# Altium PCB Multimodal.PcbDoc (part 1 of 3)
Units mil, origin at the board's own origin, x right, y up, seen from the top; angles counter-clockwise.
Board outline 1182.8 x 2149.26 mil, 6 copper layers (L1_TOP, L2_GND, L3_Signal, L4_PWR, L5_GND, L6_BOTTOM), stack 44.646 mil thick; 156 components, 97 nets, 528 pads, 619 vias.
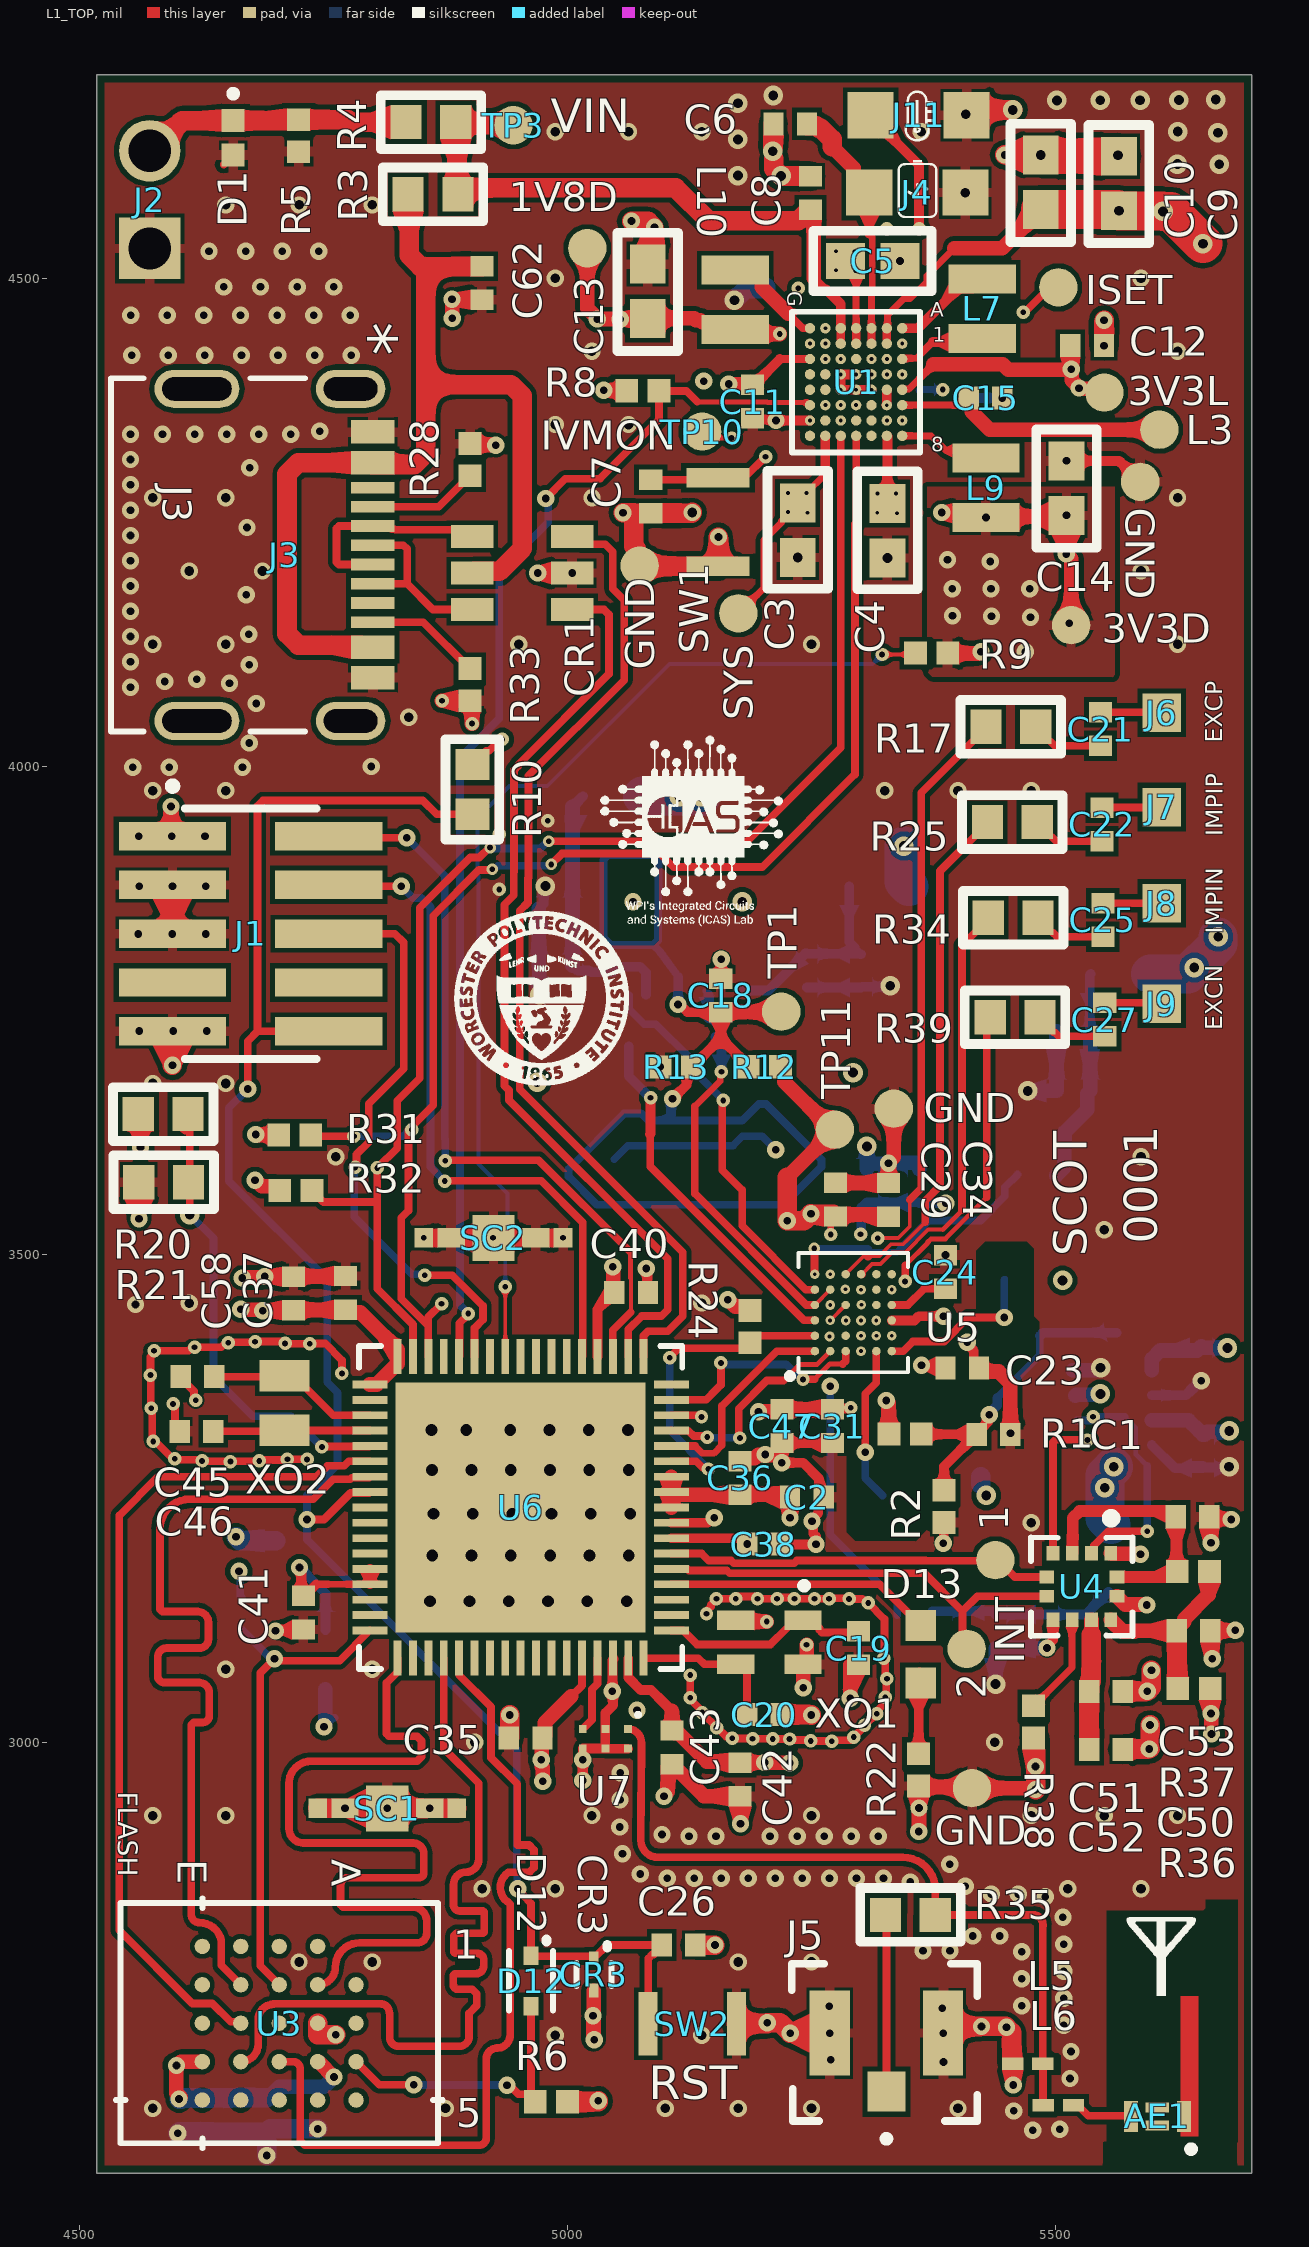
[diagram p0: L1_TOP view]
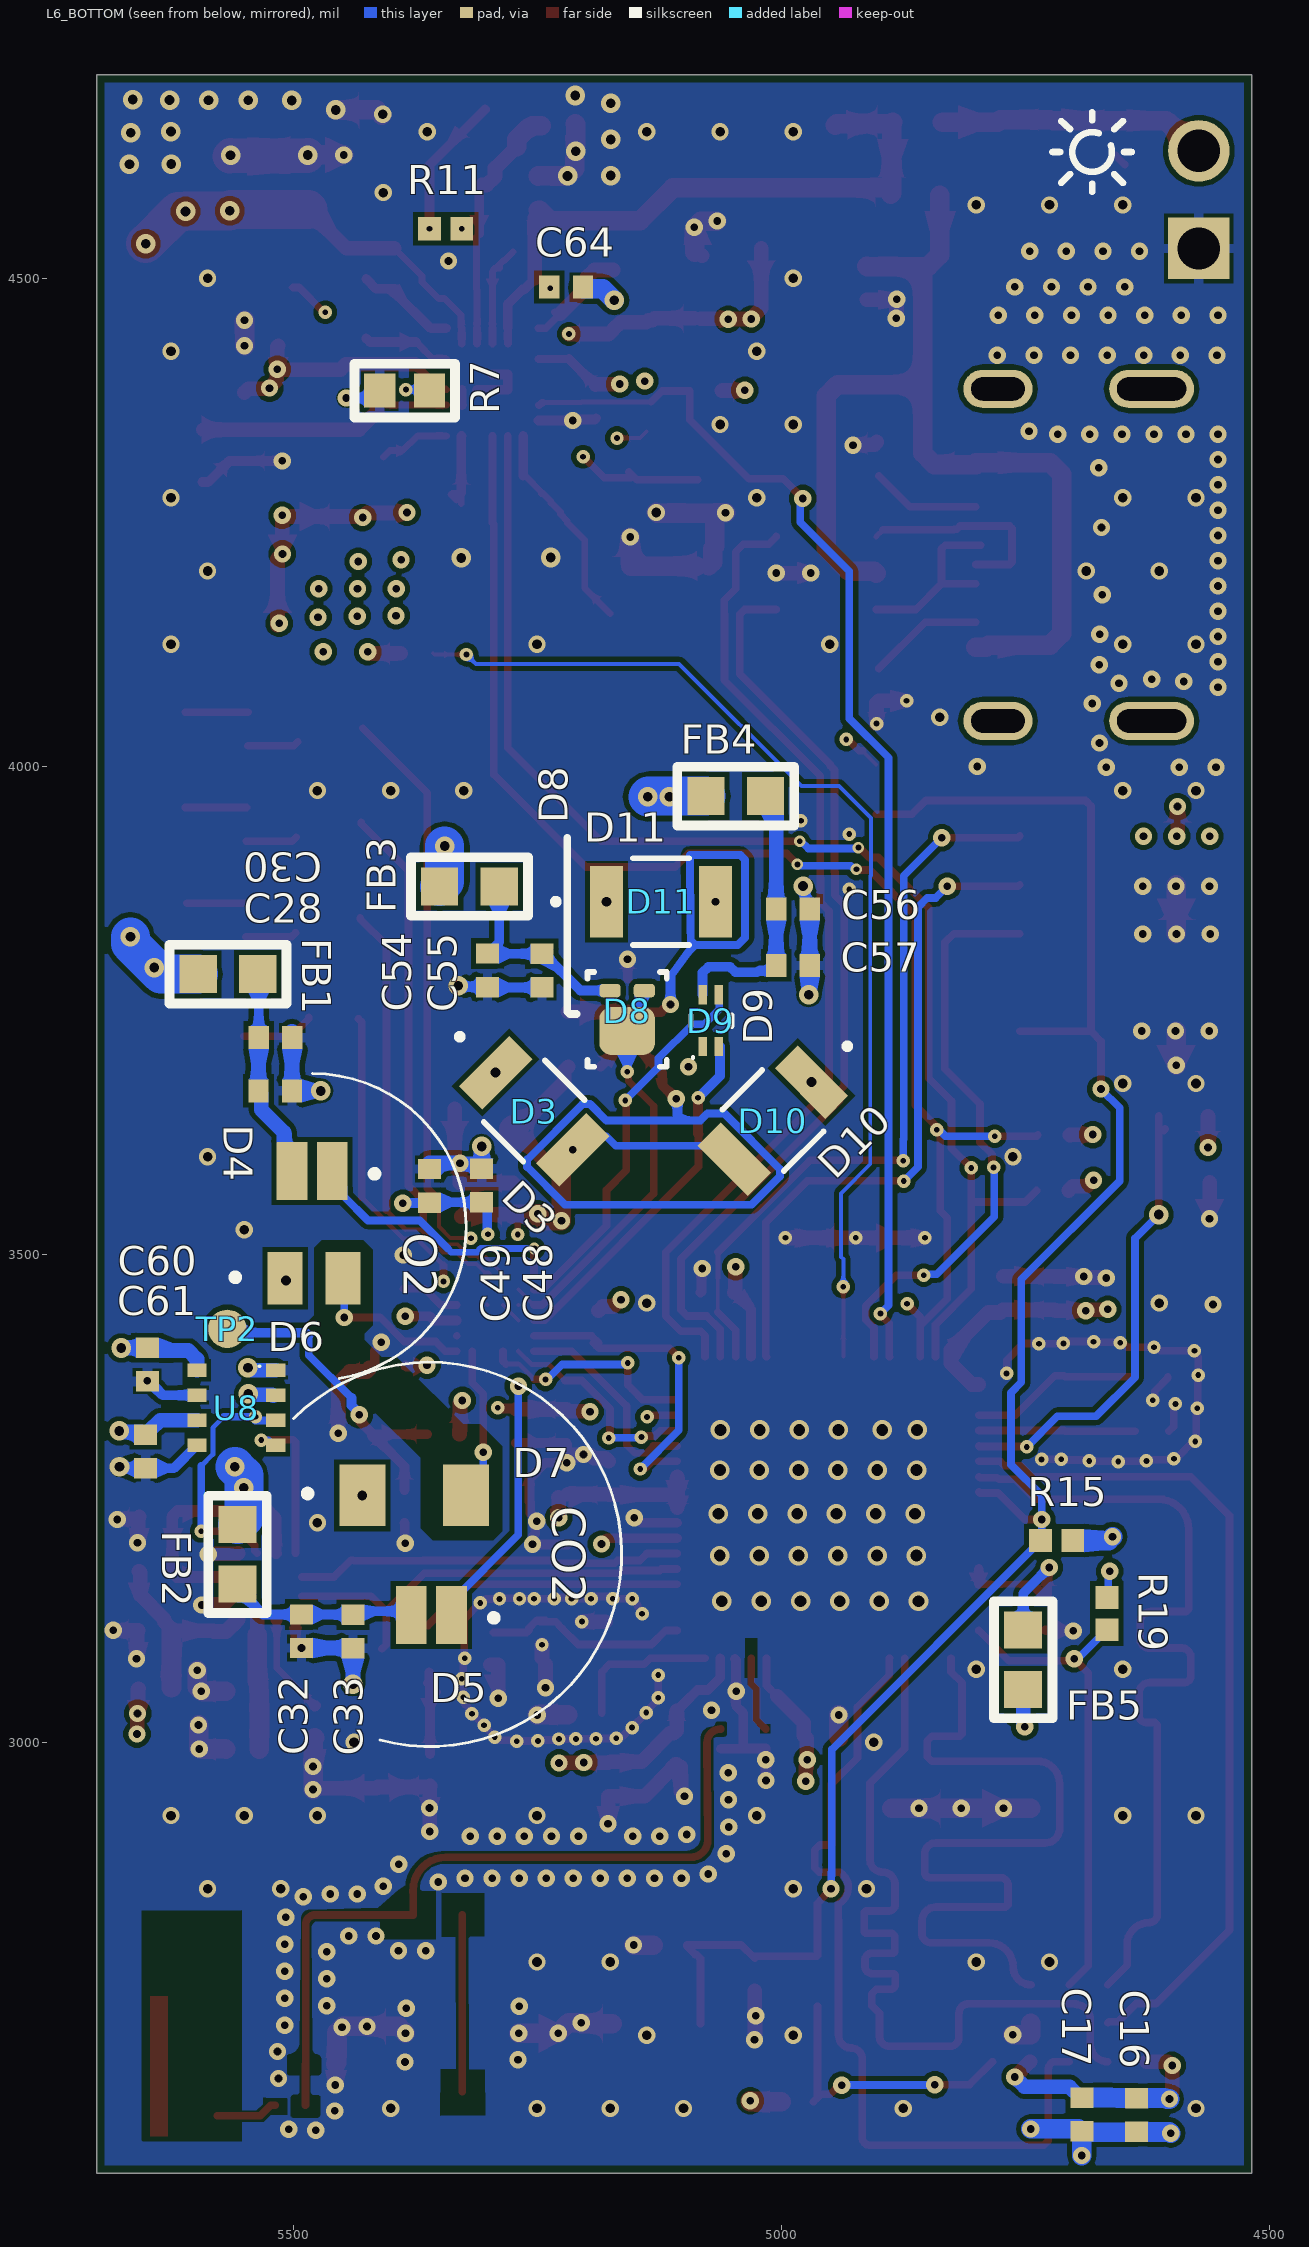
[diagram p1: L6_BOTTOM view, seen from below]
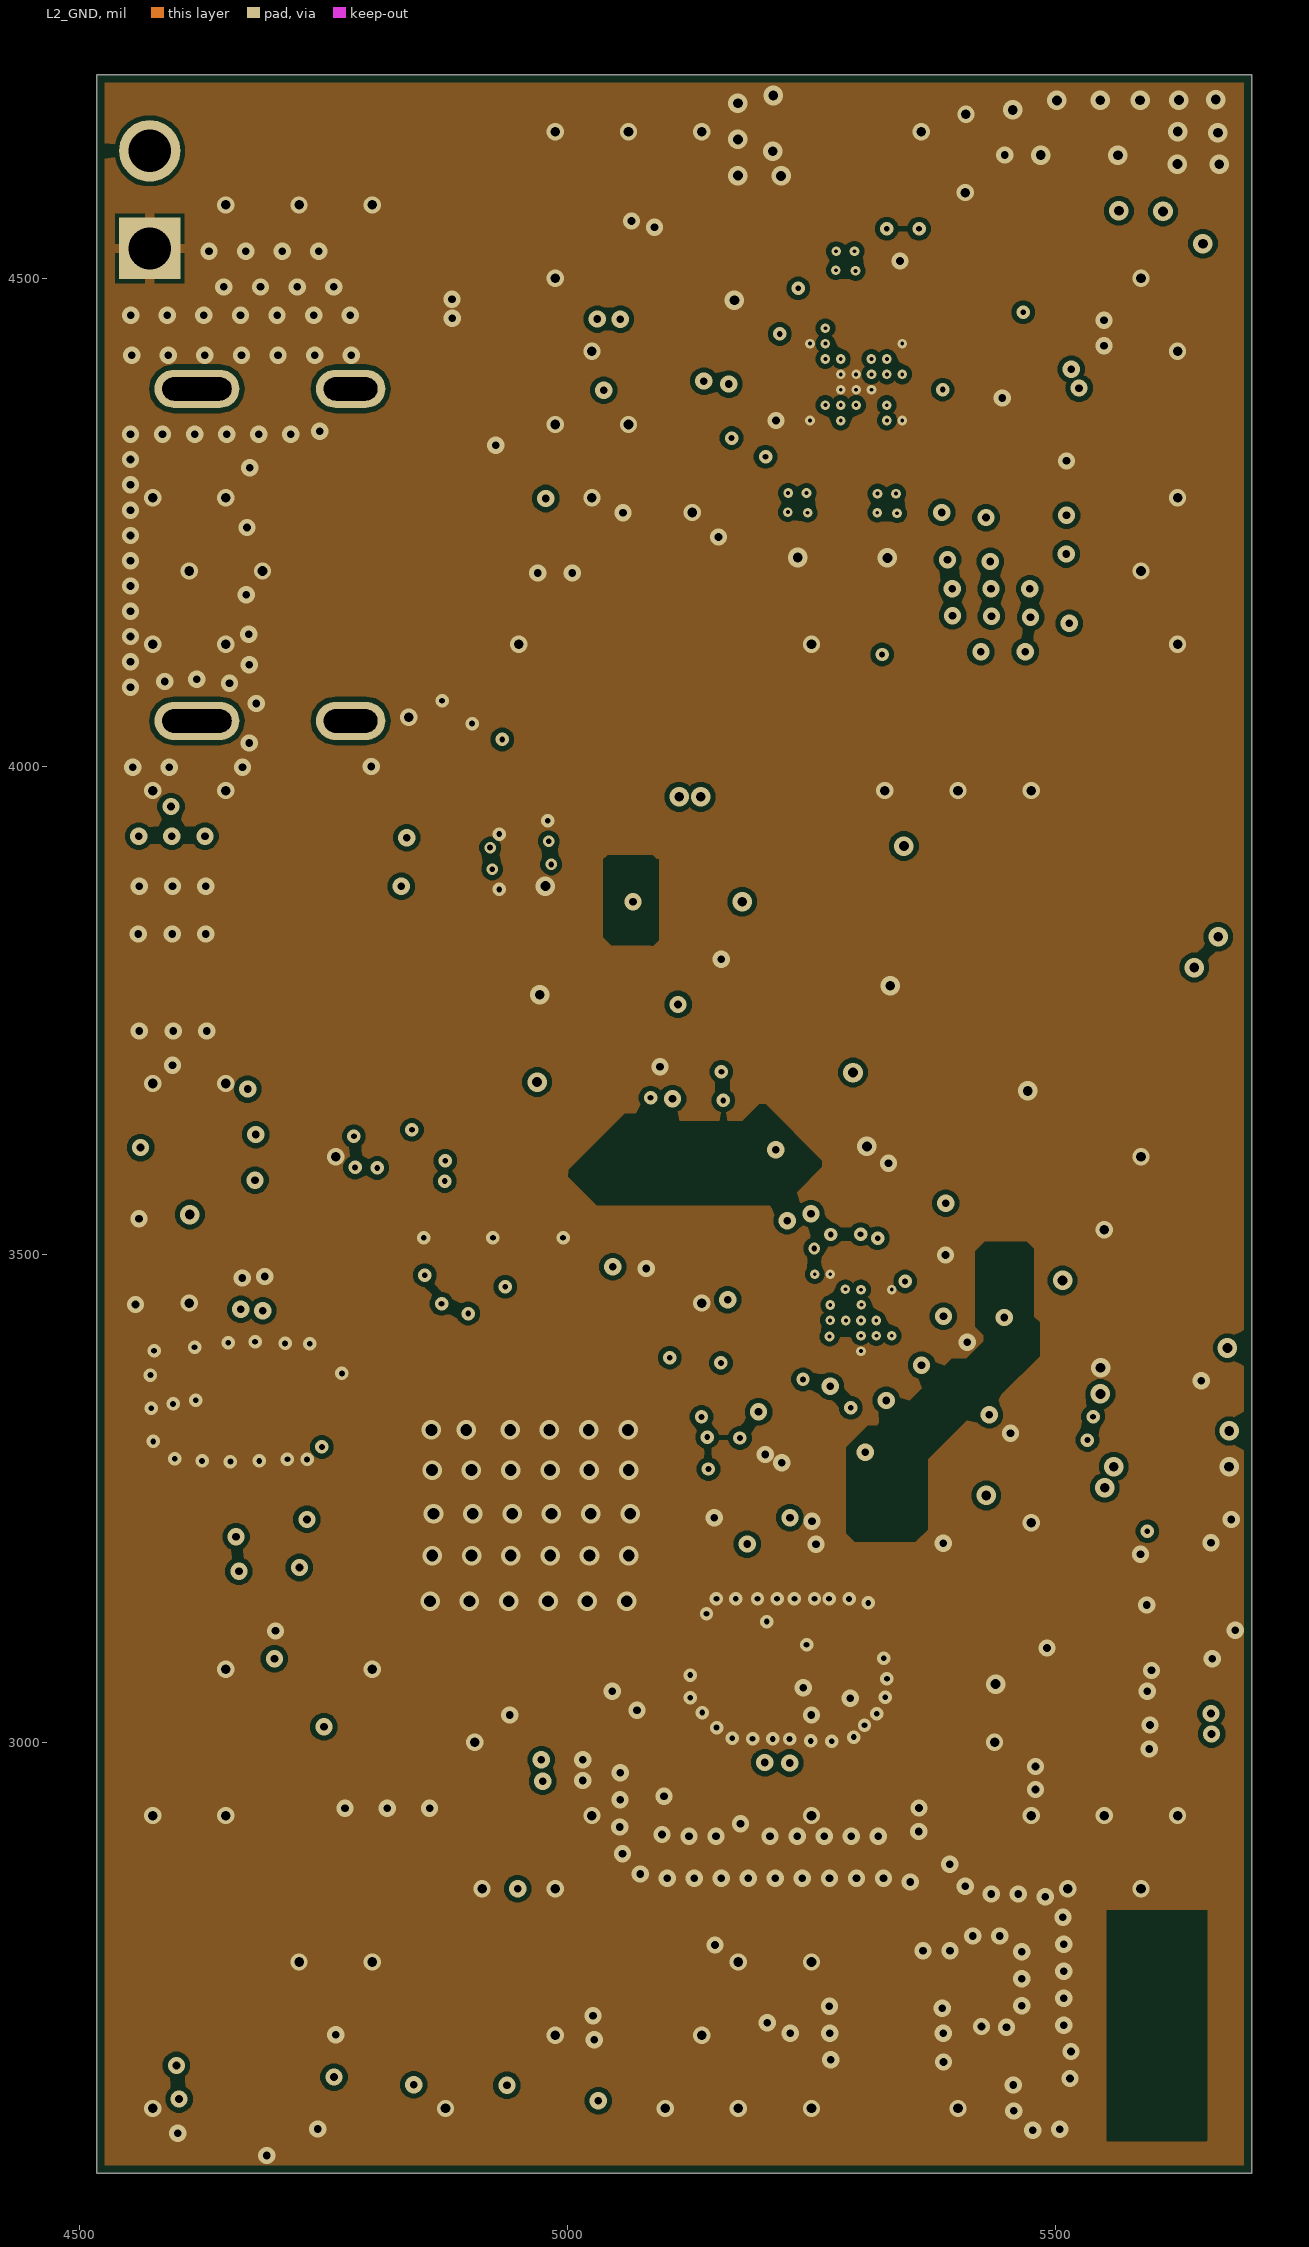
[diagram p2: L2_GND]
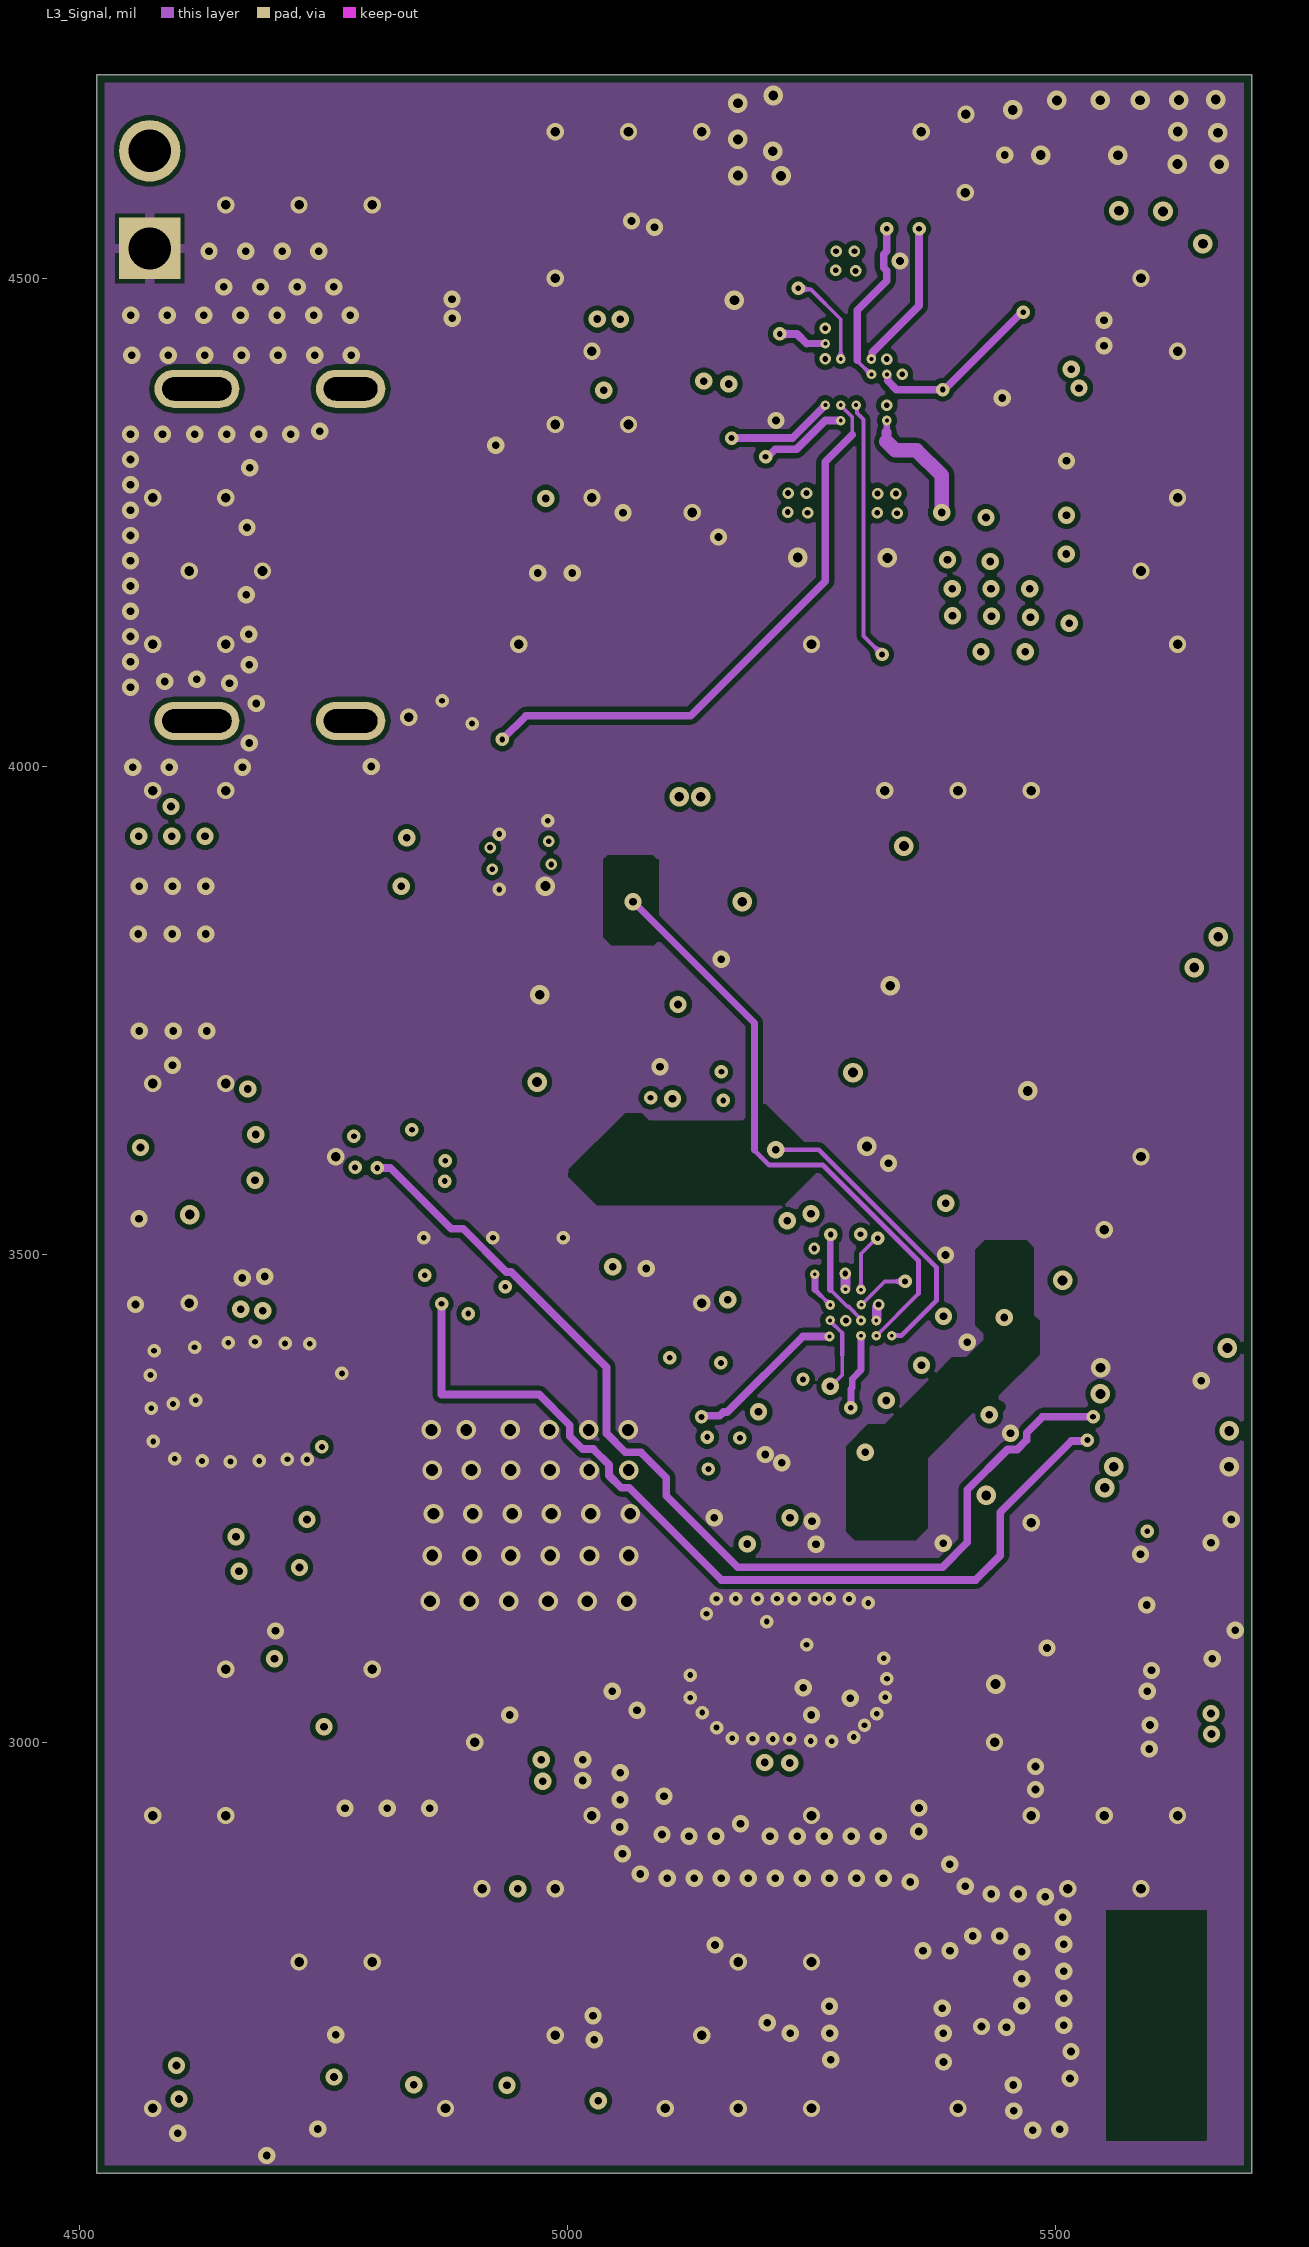
[diagram p3: L3_Signal]
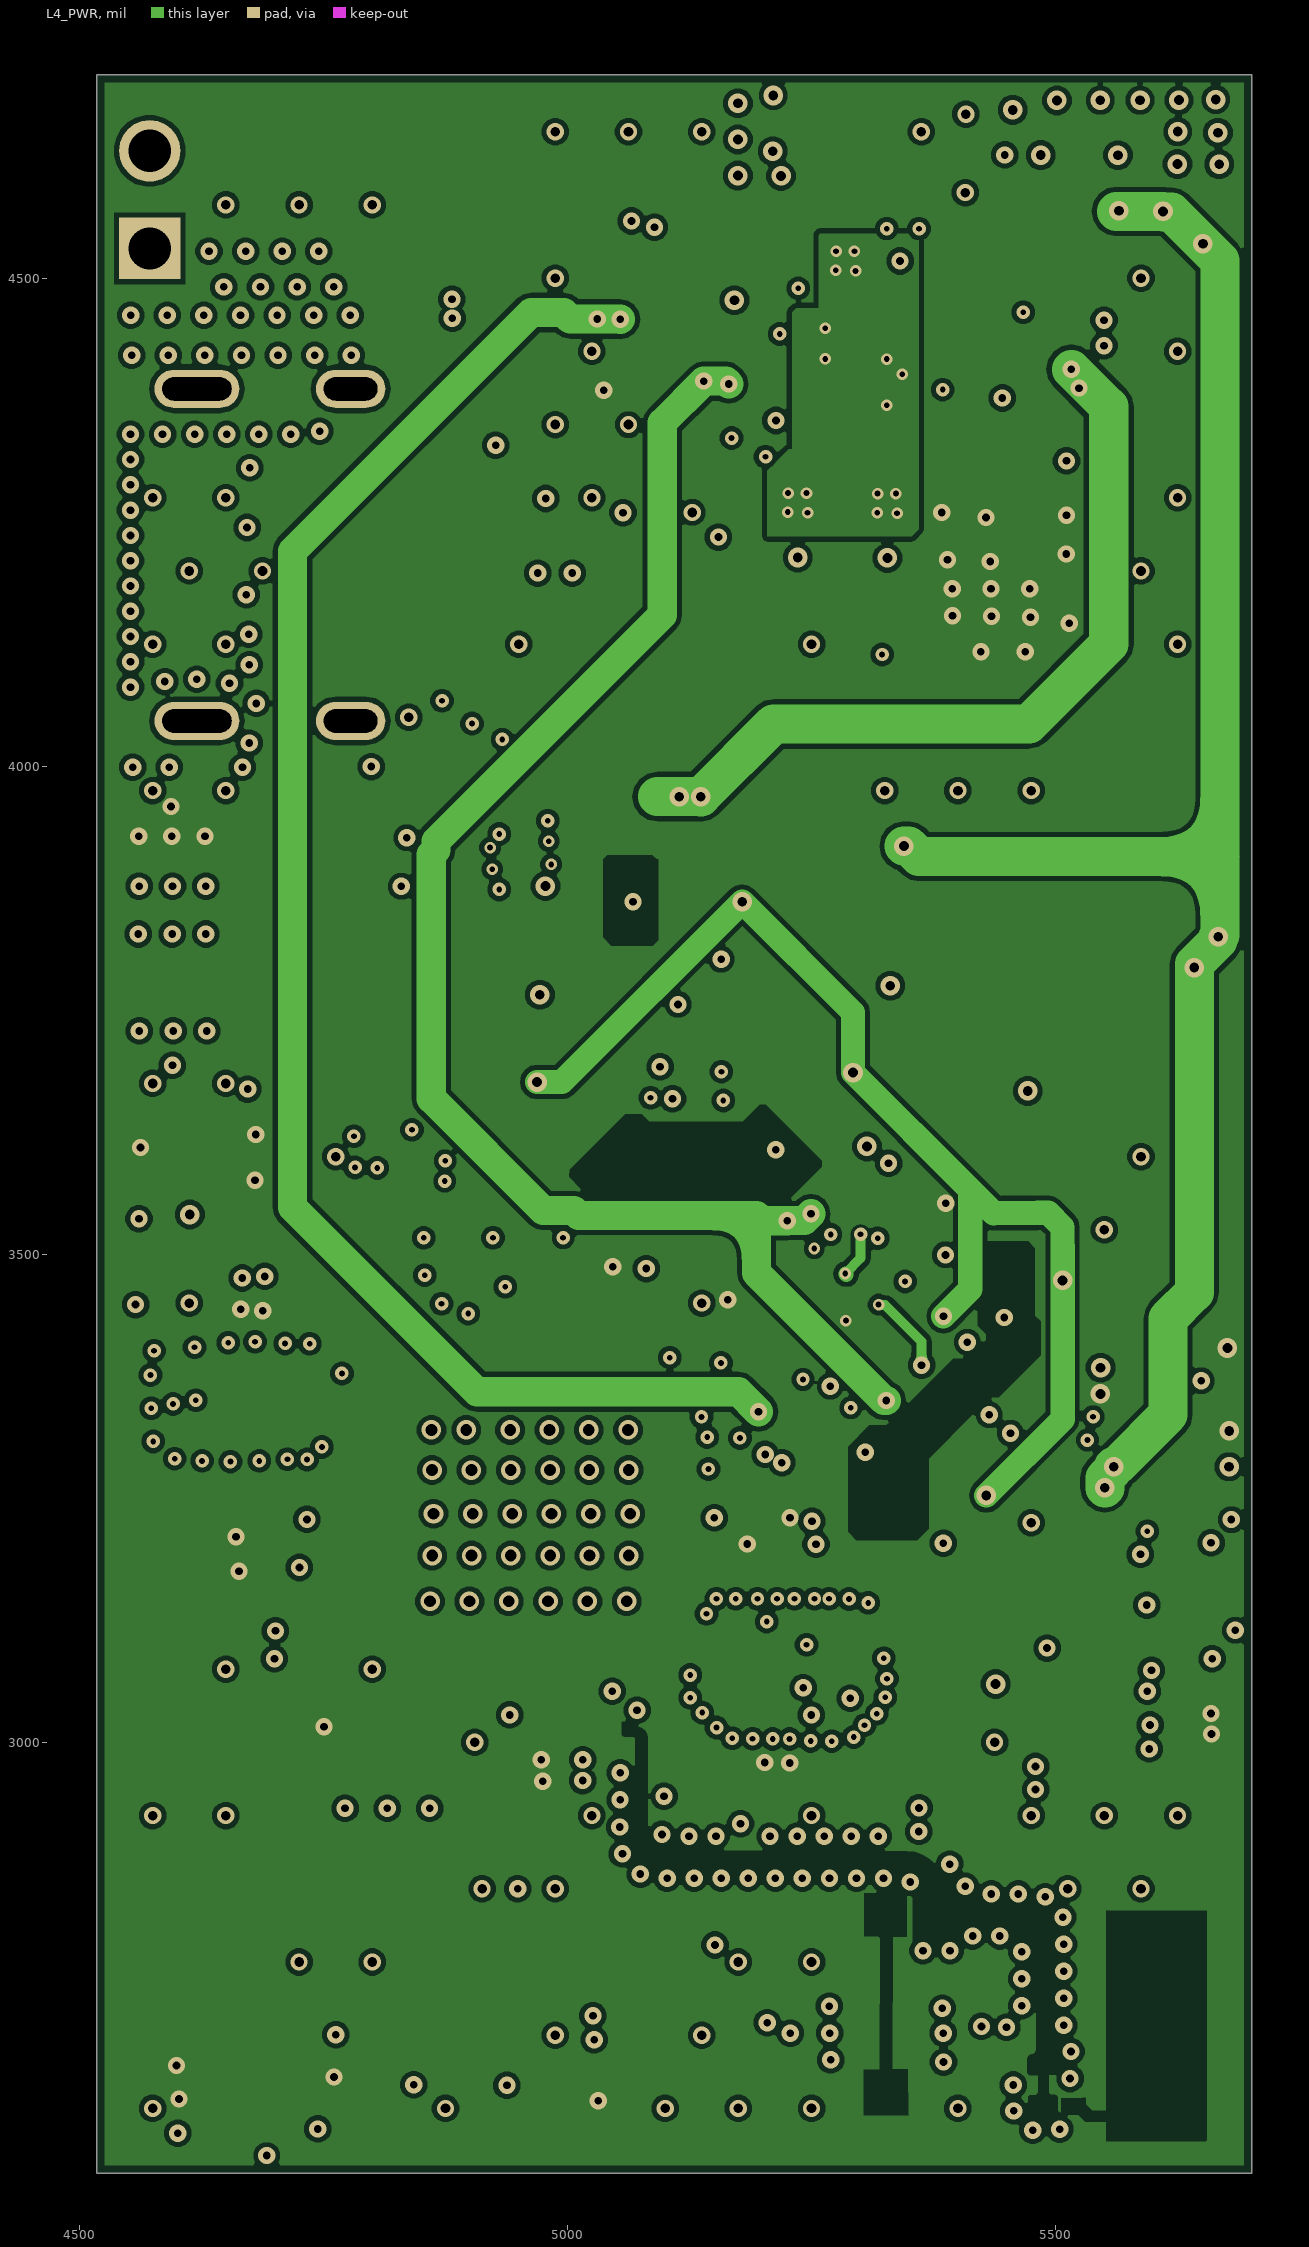
[diagram p4: L4_PWR]
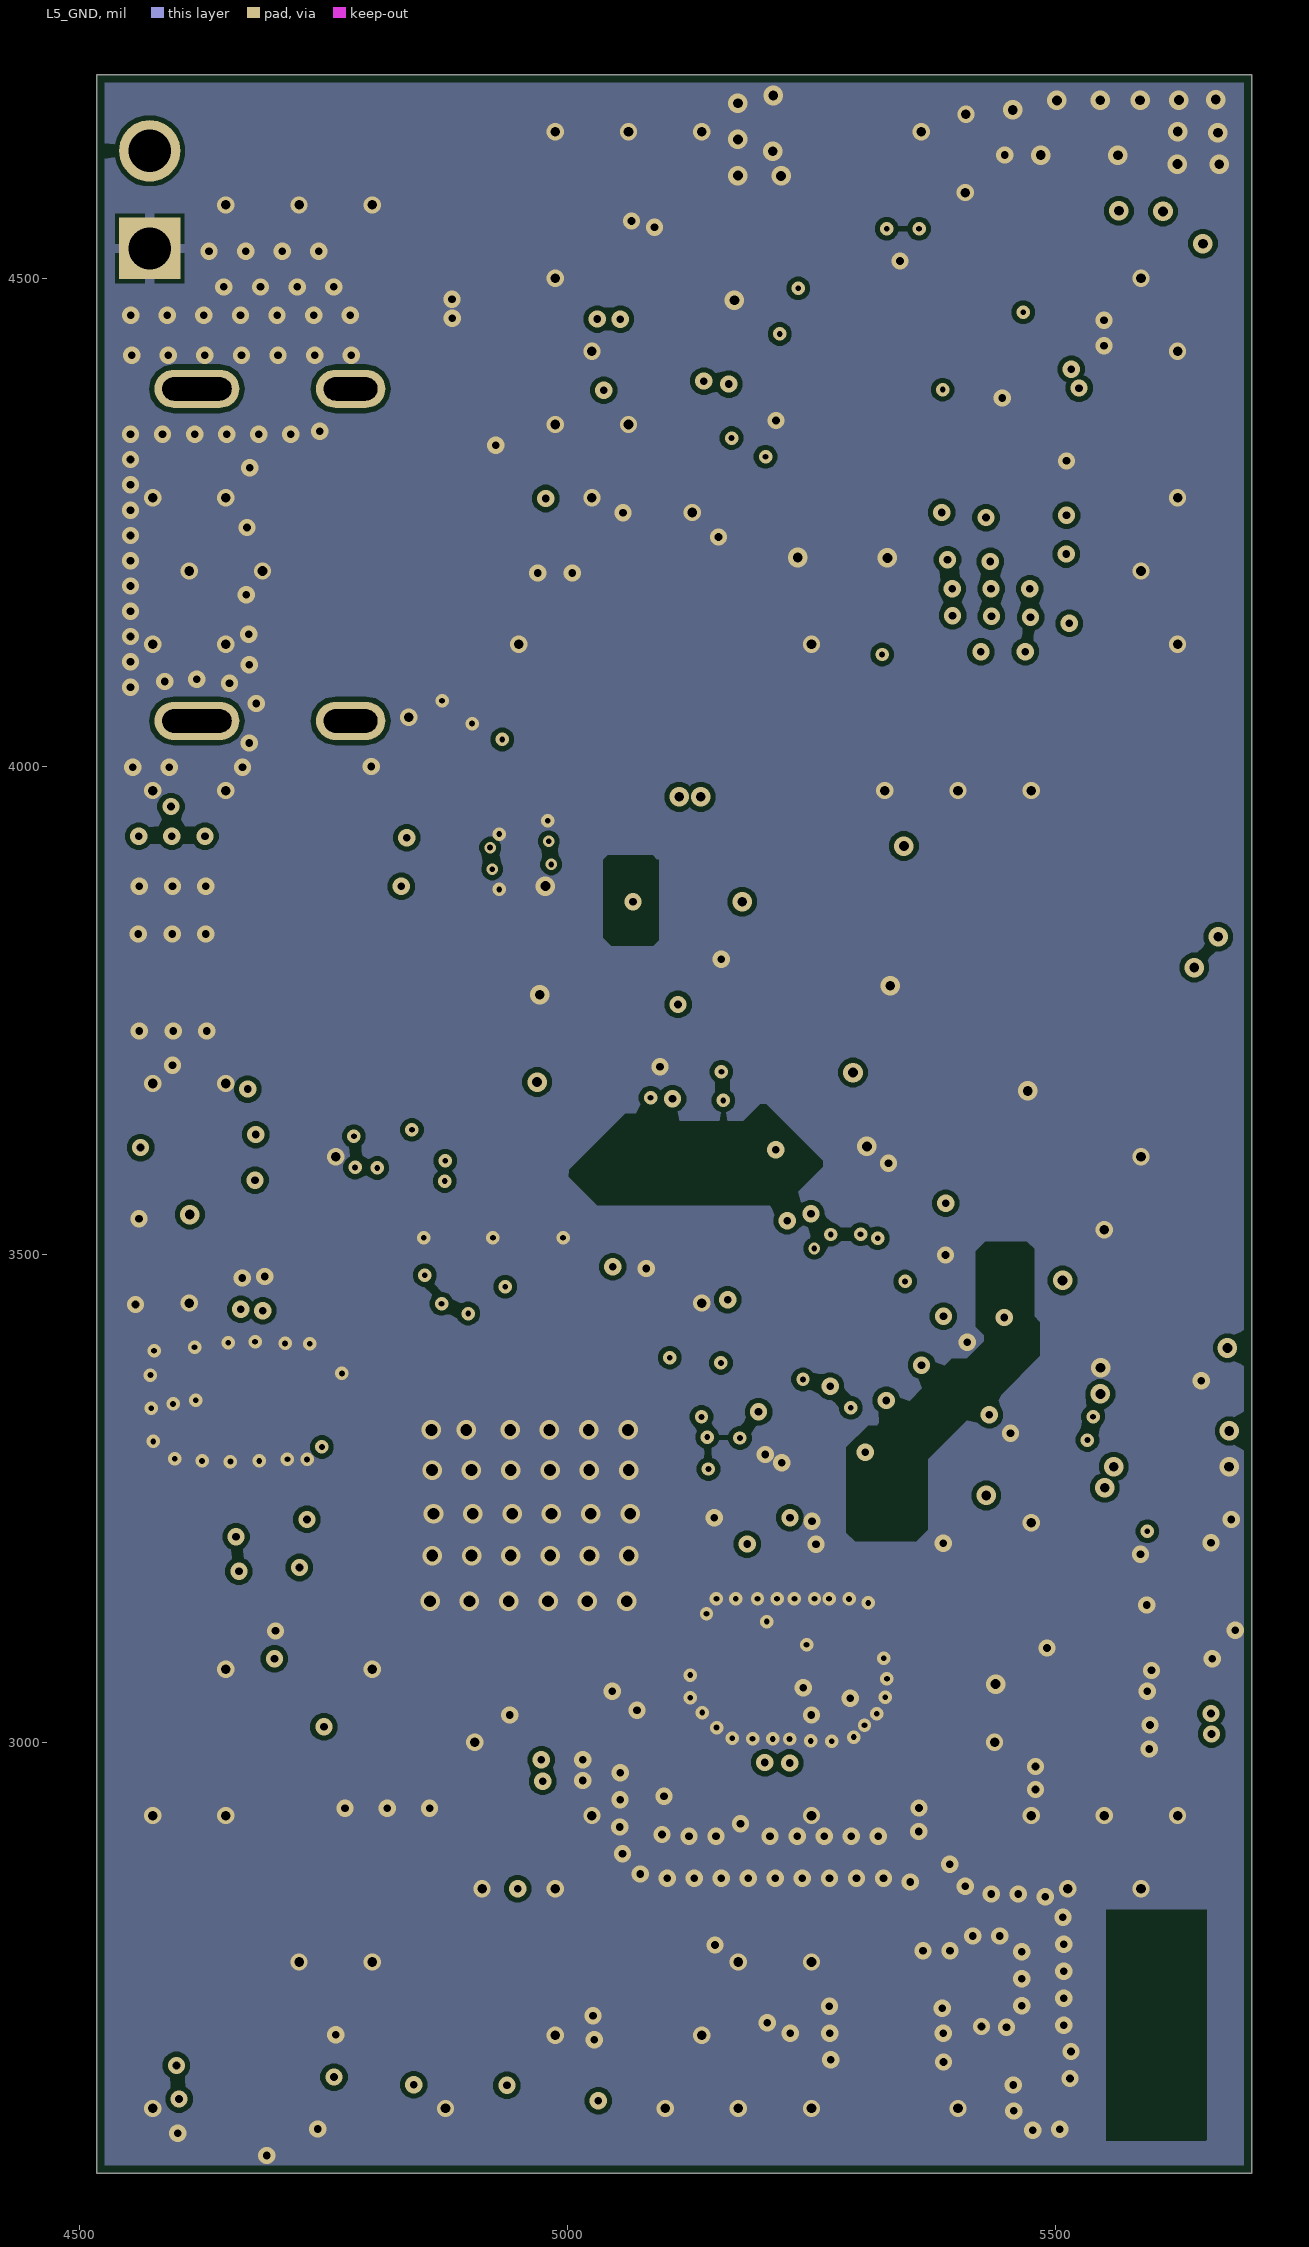
[diagram p5: L5_GND]
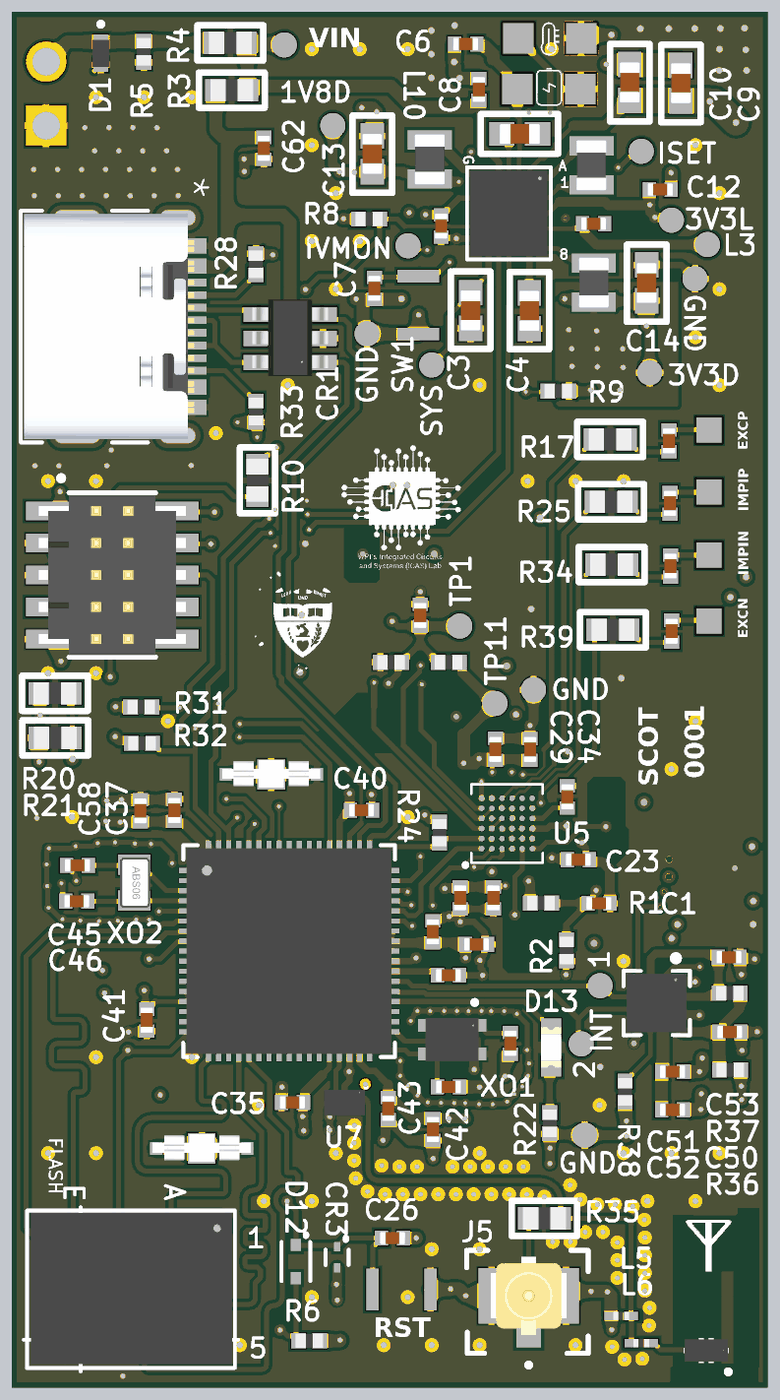
[diagram p8: 3D render of the assembled board from above, using the file's embedded part models]
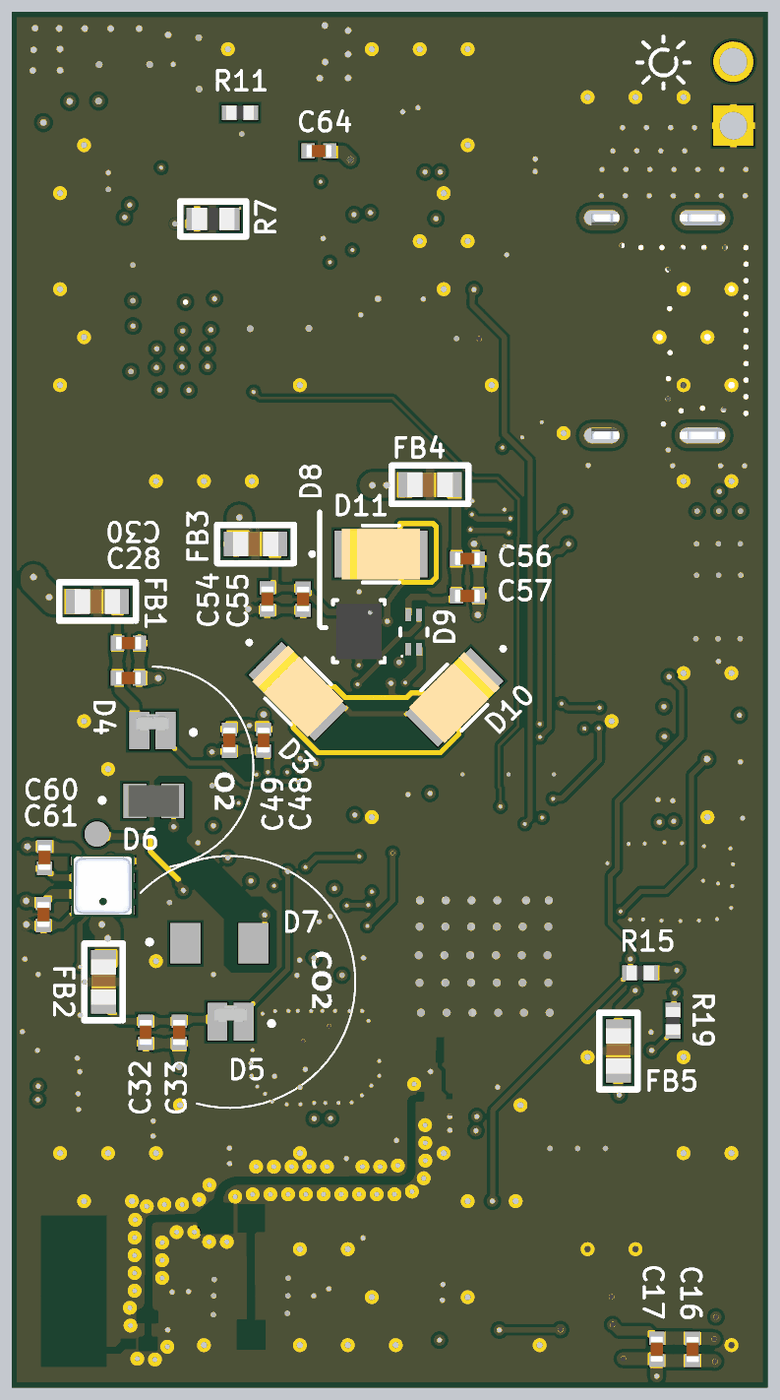
[diagram p9: 3D render of the assembled board from below, using the file's embedded part models]

## Layer stack, top to bottom
Top Solder: solder mask 0.4, Solder Resist, Dk 3.5
L1_TOP: signal copper 0.689
Dielectric 2: prepreg 4.7047, PP-006, Dk 4.45
L2_GND: signal copper 1.378
Dielectric 4: core 9.0551, PP-006, Dk 4.6
L3_Signal: signal copper 1.378
Dielectric 6: prepreg 5.1181, PP-006, Dk 4.45
Dielectric 7: prepreg 5.1181, PP-006, Dk 4.45
L4_PWR: signal copper 1.378
Dielectric 5: core 9.0551, PP-006, Dk 4.6
L5_GND: signal copper 1.378
Dielectric 3: prepreg 4.7047, PP-006, Dk 4.45
L6_BOTTOM: signal copper 0.689
Bottom Solder: solder mask 0.4, Solder Resist, Dk 3.5

## Board outline
4518,2558.83 5700.8,2558.83 5700.8,4708.09 4518,4708.09

## Design rules (kind name [scope] priority, off if disabled: settings)
BoardOutlineClearance [All] p1: gap=7.87 ignorepadtopadclearanceinfootprint=FALSE
Clearance Clearance_1 [All] p1: gap=5 ignorepadtopadclearanceinfootprint=TRUE except(2.36: Arc-Arc Arc-Track Track-Track; 3.94: Arc-SMDPad Arc-THPad Arc-Via Track-SMDPad Track-THPad Track-Via SMDPad-Via THPad-Via Via-Via)
Clearance Clearance_viapad_blind [IsBlindVia] p2: gap=3 ignorepadtopadclearanceinfootprint=TRUE
Clearance Clearance_viapad_microvia [IsMicroVia] p3: gap=3 ignorepadtopadclearanceinfootprint=TRUE
Clearance Clearance_keepout [Keepout] p4: gap=0 ignorepadtopadclearanceinfootprint=TRUE
ComponentClearance [All] p1: gap=4 collisioncheckmode=3 verticalgap=4 showdistances=TRUE
DiffPairsRouting [All] p1: maxlimit=15 minlimit=3 mostfreqgap=7.7 toplayer_minwidth=4 toplayer_maxwidth=71497.94 toplayer_prefwidth=4.46 midlayer1_minwidth=4 midlayer1_maxwidth=71497.94 midlayer1_prefwidth=4.46 midlayer2_minwidth=4 midlayer2_maxwidth=71497.94 midlayer2_prefwidth=4.46 midlayer3_minwidth=4 midlayer3_maxwidth=71497.94 midlayer3_prefwidth=4.46 midlayer4_minwidth=4 midlayer4_maxwidth=71497.94 midlayer4_prefwidth=4.46 bottomlayer_minwidth=4 bottomlayer_maxwidth=71497.94 bottomlayer_prefwidth=4.46 maxuncoupledlength=500
Height [All] p1: minheight=0 maxheight=71497.94 prefheight=500
HoleSize [All] p1: absolutevalues=TRUE maxlimit=248.03 minlimit=3.94 maxpercent=80.000 minpercent=20.000
HoleToHoleClearance [All] p1: gap=7.87 allowstackedmicrovias=TRUE
MatchedLengths flash_quad_spi [InNetClass('FLASH_QUAD_SPI')] p1: tolerance=10 checknetsindiffpair=FALSE checkdiffpairvsdiffpair=TRUE checkxsignals=TRUE checkothers=TRUE
MinimumAnnularRing [IsVia] p1: minimumring=2
MinimumSolderMaskSliver MinimumSolderMaskSliver_via [IsVia] p1: minsoldermaskwidth=0
MinimumSolderMaskSliver [All] p2: minsoldermaskwidth=2
PlaneClearance [All] p1: clearance=4
PlaneConnect PlaneConnectPowerPads [InPadClass('PowerPads')] p1: planeconnectstyle=Direct reliefexpansion=20 reliefentries=4 reliefconductorwidth=10 reliefairgap=10
PlaneConnect [All] p2: pad.planeconnectstyle=Relief pad.reliefexpansion=11.81 pad.reliefentries=4 pad.reliefconductorwidth=4 pad.reliefairgap=4 via.planeconnectstyle=Direct via.reliefexpansion=11.81 via.reliefentries=4 via.reliefconductorwidth=5 via.reliefairgap=5
PolygonConnect PolygonConnectPowerPads [All vs (InPadClass('PowerPads'))] p1: connectstyle=Direct reliefconductorwidth=10 reliefentries=4 polygonreliefangle="90 Angle" airgapwidth=10
PolygonConnect [All] p2: thpad.connectstyle=Relief thpad.reliefconductorwidth=10 thpad.reliefentries=4 thpad.polygonreliefangle="90 Angle" thpad.airgapwidth=4 smdpad.connectstyle=Relief smdpad.reliefconductorwidth=10 smdpad.reliefentries=4 smdpad.polygonreliefangle="90 Angle" smdpad.airgapwidth=3 via.connectstyle=Direct via.reliefconductorwidth=5 via.reliefentries=4 via.polygonreliefangle="90 Angle" via.airgapwidth=5
RoutingVias RoutingVias_blind [IsBlindVia] p1: holewidth=3.94 width=9.84 viastyle="Through Hole" minholewidth=3.94 minwidth=9.84 maxholewidth=9.84 maxwidth=17.72
RoutingVias RoutingVias_buried [IsBuriedVia] p2: holewidth=5.91 width=11.81 viastyle="Through Hole" minholewidth=5.91 minwidth=11.81 maxholewidth=5.91 maxwidth=11.81
RoutingVias RoutingVias_micro [IsMicroVia] p3: holewidth=3.94 width=9.84 viastyle="Through Hole" minholewidth=3.94 minwidth=9.84 maxholewidth=3.94 maxwidth=9.84
RoutingVias RoutingVias_thru [IsThruVia] p4: holewidth=5.91 width=17.72 viastyle="Through Hole" minholewidth=5.91 minwidth=11.81 maxholewidth=10 maxwidth=20
RoutingVias [All] p5: holewidth=7.87 width=17.72 viastyle="Through Hole" minholewidth=7.87 minwidth=17.72 maxholewidth=248.03 maxwidth=257.87
SilkToSilkClearance [All] p1: silktosilkclearance=5
SilkToSolderMaskClearance [IsPad] p1: minsilkscreentomaskgap=2 clearancetoexposedcopper=TRUE
SolderMaskExpansion [All] p1: expansion=2 istentingtop=FALSE
SupplyNets "Schematic Supply Nets_8" [InNet('3V3_LED')] p1: voltage=0.000
SupplyNets "Schematic Supply Nets_7" [InNet('1V8D')] p2: voltage=0.000
SupplyNets "Schematic Supply Nets_6" [InNet('1V8A')] p3: voltage=0.000
SupplyNets "Schematic Supply Nets_5" [InNet('5V_LED')] p4: voltage=0.000
SupplyNets "Schematic Supply Nets_4" [InNet('USB_VBUS')] p5: voltage=0.000
SupplyNets "Schematic Supply Nets_3" [InNet('GND')] p6: voltage=0.000
SupplyNets "Schematic Supply Nets_1" [InNet('3V3D')] p7: voltage=0.000
UnRoutedNet [All] p1: checkbadconnections=TRUE
ViasUnderSMD ViasUnderSMD_bga [All] p1: allowed=TRUE
ViasUnderSMD [All] p2: allowed=FALSE
Width [All] p1: maxlimit=50 minlimit=3 preferedwidth=10 toplayer_prefwidth=3 midlayer3_minwidth=10 midlayer3_maxwidth=10 midlayer4_minwidth=10 midlayer4_maxwidth=10 bottomlayer_prefwidth=3 minimp=50.000000 maximp=50.000000 favimp=50.000000
Width Power_20mil [All] p2: maxlimit=1000 minlimit=10 preferedwidth=20 toplayer_minwidth=20 midlayer1_minwidth=20 midlayer2_minwidth=20 midlayer3_maxwidth=10 midlayer3_prefwidth=10 midlayer4_maxwidth=10 midlayer4_prefwidth=10 bottomlayer_minwidth=20 minimp=50.000000 maximp=50.000000 favimp=50.000000
Width Power_12mil [All] p3: maxlimit=1000 minlimit=10 preferedwidth=12 toplayer_minwidth=12 midlayer1_minwidth=12 midlayer2_minwidth=12 midlayer3_maxwidth=10 midlayer3_prefwidth=10 midlayer4_maxwidth=10 midlayer4_prefwidth=10 bottomlayer_minwidth=12 minimp=50.000000 maximp=50.000000 favimp=50.000000
Width Width_10mil [All] p4: maxlimit=1000 minlimit=10 preferedwidth=10 midlayer3_maxwidth=10 midlayer4_maxwidth=10 minimp=50.000000 maximp=50.000000 favimp=50.000000
Width Width_6mil [All] p5: maxlimit=1000 minlimit=6 preferedwidth=6 midlayer3_minwidth=10 midlayer3_maxwidth=10 midlayer3_prefwidth=10 midlayer4_minwidth=10 midlayer4_maxwidth=10 midlayer4_prefwidth=10 minimp=50.000000 maximp=50.000000 favimp=50.000000
Width Width_4mil [All] p6: maxlimit=71497.94 minlimit=4 preferedwidth=4 toplayer_maxwidth=1000 midlayer1_maxwidth=1000 midlayer2_maxwidth=1000 bottomlayer_maxwidth=1000 minimp=50.000000 maximp=50.000000 favimp=50.000000
19 further rules are at their usual default settings.

## Classes and differential pairs
component class U_13-multimodal-connections: C62 CR1 J1 J3 R28 R33
component class U_12-multimodal-accelerometer: 1 2 C50 C51 C52 C53 R36 R37 R38 U4
component class U_11-multimodal-combined-sensor: C60 C61 U8
component class U_10-multimodal-microcontroller-rf: AE1 J5 L5 L6 R35 SC1 SC2 SH1 U7
component class U_08-multimodal-microcontroller-oscillators: C19 C20 C45 C46 XO1 XO2
component class U_07-multimodal-microcontroller: C2 C26 C35 C36 C37 C38 C40 C41 C42 C43 C58 CR3 D13 FB5 R15 R20 R21 R22 R31 R32 SW2 U6
component class U_06-multimodal-analogfrontend-PPG: C54 C55 C56 C57 D3 D8 D9 D10 D11 FB3 FB4
component class U_05-multimodal-analogfrontend: C1 C18 C21 C22 C23 C24 C25 C27 C28 C29 C30 C31 C32 C33 C34 C47 C48 C49 D4 D5 D6 D7 FB1 FB2 J6 J7 J8 J9 R1 R2 R12 R13 R17 R24 R25 R34 R39 TP1 TP2 U5
component class U_04-multimodal-flash: C16 C17 D12 R6 R19 U3
component class U_01-multimodal-powersupply: 1V8D 3V3D 3V3L C3 C4 C5 C6 C7 C8 C9 C10 C11 C12 C13 C14 C15 C64 D1 GND ISET J2 J4 J11 l3 L7 L9 L10 R3 R4 R5 R7 R8 R9 R10 R11 RST SW1 SYS TP3 TP10 TP11 U1
differential pair USB: +NetCR1_1 -NetCR1_3
differential pair NewDifferentialPair1: +NetCR1_3 -NetCR1_1
differential pair USB-C_DifferentialPair: +USB_DP -USB_DN

## Components (designator, comment, footprint, x,y, rotation, side; value= is the part's Value field where it differs from the comment)
1 "TESTPOINT_S" TESTPOINT_S 5438.37,3186.7 r0 top (schematic designator TP7)
1V8D "TESTPOINT_S" TESTPOINT_S 5020.35,4530.62 r90 top (schematic designator TP13)
2 "TESTPOINT_S" TESTPOINT_S 5408.86,3095.82 r0 top (schematic designator TP8)
3V3D "TESTPOINT_S" TESTPOINT_S 5515.91,4144.51 r90 top (schematic designator TP14)
3V3L "TESTPOINT_S" TESTPOINT_S 5549.93,4382.8 r90 top (schematic designator TP12)
AE1 "ANT016008LCS2442MA2" ANTENNA 5604.35,2616.77 r180 top
C1 "C1005X5R1V105K050BC" CAPTDK0402 5436.54,3315.35 r0 top
C2 "C1005X5R1A475K050BC" CAPTDK0402 5245.16,3251.19 r0 top
C3 "GRM188R61A226ME15D" CAPTDK0603 5235.85,4241.7 r270 top
C4 "GRM188R61A226ME15D" CAPTDK0603 5327.72,4241.22 r270 top
C5 "GRM188R61A226ME15D" CAPTDK0603 5312.78,4517.54 r0 top
C6 "CL05A225KO5NQNC" CAPTDK0402 5228.19,4658.05 r180 top
C7 "C1005X7R1H104K050BB" CAPTDK0402 5085.29,4276.38 r270 top
C8 "C1005X5R1V105K050BC" CAPTDK0402 5248.87,4587.13 r90 top
C9 "GRM188R61A226ME15D" CAPTDK0603 5564.85,4596.86 r90 top
C10 "GRM188R61A226ME15D" CAPTDK0603 5484.78,4598.09 r90 top
C11 "CL05A225KO5NQNC" CAPTDK0402 5189.74,4373.56 r270 top
C12 "CL05A225KO5NQNC" CAPTDK0402 5532.42,4430.8 r0 top
C13 "GRM188R61A226ME15D" CAPTDK0603 5082.1,4486.42 r90 top
C14 "GRM188R61A226ME15D" CAPTDK0603 5511.17,4284.84 r90 top
C15 "CL05A225KO5NQNC" CAPTDK0402 5428.26,4377.21 r0 top
C16 "C1005X5R1V105K050BC" CAPTDK0402 4635.78,2618.24 r270 bottom
C17 "C1005X7R1H104K050BB" CAPTDK0402 4691.88,2618.75 r270 bottom
C18 "C1005X5R1V105K050BC" CAPTDK0402 5157.02,3765.23 r90 top
C19 "CGA2B2C0G1H120J050BA" CAPTDK0402 5298.11,3096.58 r270 top
C20 "CGA2B2C0G1H120J050BA" CAPTDK0402 5201.32,3028.51 r0 top
C21 "GRM155R60J474KE19D" CAPTDK0402 5546.05,4038.03 r90 top
C22 "GRM155R60J474KE19D" CAPTDK0402 5547.58,3940.4 r90 top
C23 "C1005X5R1V105K050BC" CAPTDK0402 5404.41,3383.69 r0 top
C24 "C1005X5R1V105K050BC" CAPTDK0402 5387.02,3481.75 r90 top
C25 "GRM155R60J474KE19D" CAPTDK0402 5548.44,3842.47 r90 top
C26 "C1005X7R1H104K050BB" CAPTDK0402 5113.69,2792.39 r0 top
C27 "GRM155R60J474KE19D" CAPTDK0402 5550.37,3740.48 r90 top
C28 "0402W106M6R3HI" CAPTDK0402 5518.2,3667.46 r180 bottom
C29 "C1005X7R1H104K050BB" CAPTDK0402 5274.54,3555.94 r90 top
C30 "C1005X7R1H104K050BB" CAPTDK0402 5517.89,3721.93 r180 bottom
C31 "C1005X7R1H104K050BB" CAPTDK0402 5271.46,3323.91 r270 top
C32 "0402W106M6R3HI" CAPTDK0402 5491.28,3113.81 r270 bottom
C33 "C1005X7R1H104K050BB" CAPTDK0402 5438.59,3113.66 r270 bottom
C34 "GRM155R61A106ME11D" CAPTDK0402 5328.93,3555.78 r90 top
C35 "C1005X7R1H104K050BB" CAPTDK0402 4957.17,3004.46 r180 top
C36 "C1005X7R1H104K050BB" CAPTDK0402 5176.75,3270.81 r90 top
C37 "C1005X7R1H104K050BB" CAPTDK0402 4772.72,3460.5 r90 top
C38 "C1005X5R1A475K050BC" CAPTDK0402 5201.24,3203.1 r0 top
C40 "C1005X7R1H104K050BB" CAPTDK0402 5065.25,3460.82 r0 top
C41 "C1005X7R1H104K050BB" CAPTDK0402 4729.33,3132.87 r270 top
C42 "C1005X7R1H104K050BB" CAPTDK0402 5176.92,2962.01 r270 top
C43 "CGA2B2C0G1H101J050BA" CAPTDK0402 5106.97,2994.89 r270 top
C45 "CGA2B2C0G1H120J050BA" CAPTDK0402 4620.98,3374.65 r180 top
C46 "CGA2B2C0G1H120J050BA" CAPTDK0402 4619.98,3318.65 r180 top
C47 "GRM155R61A106ME11D" CAPTDK0402 5219.62,3323.93 r270 top
C48 "C1005X7R1H104K050BB" CAPTDK0402 5306.74,3570.42 r90 bottom
C49 "GRM155R61A106ME11D" CAPTDK0402 5360.21,3570.13 r90 bottom
C50 "C1005X5R1V105K050BC" CAPTDK0402 5641.24,3114.36 r0 top
C51 "C1005X7R1H104K050BB" CAPTDK0402 5551.68,3052.28 r0 top
C52 "C1005X7R1H104K050BB" CAPTDK0402 5551.68,2992.73 r0 top
C53 "C1005X7R1H104K050BB" CAPTDK0402 5640.14,3231.1 r0 top
C54 "0402W106M6R3HI" CAPTDK0402 5300.84,3790.93 r270 bottom
C55 "C1005X7R1H104K050BB" CAPTDK0402 5245.04,3790.67 r270 bottom
C56 "0402W106M6R3HI" CAPTDK0402 4987.86,3853.85 r180 bottom
C57 "C1005X7R1H104K050BB" CAPTDK0402 4987.86,3795.88 r180 bottom
C58 "C1005X7R1H104K050BB" CAPTDK0402 4719.37,3459.91 r90 top
C60 "C1005X7R1H104K050BB" CAPTDK0402 5649.21,3387.18 r270 bottom
C61 "C1005X7R1H104K050BB" CAPTDK0402 5651.03,3298.02 r270 bottom
C62 "CGA2B2C0G1H101J050BA" CAPTDK0402 4912.4,4495.08 r270 top
C64 "CL05A225KO5NQNC" CAPTDK0402 5220.11,4490.83 r180 bottom
CR1 "USBLC6-2SC6" SOT-23 4953.74,4197.83 r180 top
CR3 "ESD9X5.0ST5G" SOD-923_514AB_ONS 5027.05,2762.23 r270 top
D1 "DESD3V3S1BL-7B" TVSDIODE-0402 4657.48,4643.7 r270 top
D3 "SFH 2703" "LED_SFH 2703_OSR" 5252.95,3646.65 r225 bottom
D4 "LXZ1-PR01" LXZ1-PR01 5480.48,3585.35 r0 bottom
D5 "LXZ1-PR01" LXZ1-PR01 5358.31,3130.46 r0 bottom
D6 "019-141-411-R" RED-PD 5478.49,3475.38 r180 bottom
D7 "S15193" S15193 5375.81,3252.93 r180 bottom
D8 "CT DBLP31.12-6C5D-56-J6Q4" "CT DBLP31.12-6C5D-56-J6Q4_OSR" 5157.65,3740.59 r270 bottom
D9 "SFH 7015" "SFH 7015_OSR" 5080.42,3712.75 r0 bottom
D10 "SFH 2703" "LED_SFH 2703_OSR" 5008.36,3636.93 r315 bottom
D11 "SFH 2703" "LED_SFH 2703_OSR" 5123.03,3861.22 r180 bottom
D12 "RB521S30T1G" SOD-523_0P9X1P3_ONS-L 4962.63,2755.62 r270 top
D13 "Orange" DISPLAY-LED 5361.8,3090.22 r90 top
FB1 "MAF1608GAD601CT000" INDMURT0603 5566.58,3786.99 r0 bottom
FB2 "MAF1608GAD601CT000" INDMURT0603 5556.95,3192.59 r90 bottom
FB3 "MAF1608GAD601CT000" INDMURT0603 5319.23,3876.82 r0 bottom
FB4 "MAF1608GAD601CT000" INDMURT0603 5046.41,3969.32 r0 bottom
FB5 "MFBA3V1608K-601-R" INDMURT0603 4751.97,3084.65 r90 bottom
GND "TESTPOINT_S" TESTPOINT_S 5334.26,3649.21 r90 top (schematic designator TP17)
GND "TESTPOINT_S" TESTPOINT_S 5414.38,2953.09 r90 top (schematic designator TP16)
GND "TESTPOINT_S" TESTPOINT_S 5073.9,4205.43 r90 top (schematic designator TP4)
GND "TESTPOINT_S" TESTPOINT_S 5586.79,4291.27 r90 top (schematic designator TP6)
ISET "TESTPOINT_S" TESTPOINT_S 5502.82,4490.46 r90 top (schematic designator TP9)
J1 "FTSH-105-01-F-DV-P-TR" SAMTEC_FTSH-105-01-F-DV-P-TR 4675.39,3828.4 r270 top
J2 "TH-Connector" 2-PIN-TH-CONN 4571.04,4582.37 r90 top
J3 "2171790001" 2171790001_MOL 4670.44,4216.5 r270 top
J4 "battery_connection" Battery_connection 5309.14,4587.63 r180 top
J5 "U.FL-R-SMT(10)" RF-CONNECTOR 5326.73,2702.12 r180 top
J6 "electrode" electrode 5608.78,4054.7 r0 top
J7 "electrode" electrode 5608.78,3958.16 r0 top
J8 "electrode" electrode 5608.78,3859.59 r0 top
J9 "electrode" electrode 5608.78,3756.52 r0 top
J11 "SEMITEC 103AT-11" NTC_connection 5408.93,4666.9 r0 top
L3 "TESTPOINT_S" TESTPOINT_S 5606.34,4344.73 r90 top (schematic designator TP15)
L5 "MLG0603P1N8CT000" INDTDK0201 5471.42,2670.62 r180 top
L6 "MHQ0603P2N9ST000" INDTDK0201 5502.91,2628.3 r180 top
L7 "DFE201612E-2R2M=P2" IND_DFE2016_MUR-L 5424.86,4468.6 r270 top
L9 "DFE201612E-2R2M=P2" IND_DFE2016_MUR-L 5428.7,4285.17 r270 top
L10 "DFE201612E-2R2M=P2" IND_DFE2016_MUR-L 5171.86,4477.82 r90 top
R1 "RMCF0402FT93K1" RES-STACK-POLE-0402 5345.95,3315.7 r180 top
R2 "RMCF0402FT220K" RES-STACK-POLE-0402 5385.82,3241.79 r90 top
R3 "RMCF0603ZT0R00" RES-STACK-POLE-0603 4862.21,4585.88 r180 top
R4 "RMCF0603ZT0R00" RES-STACK-POLE-0603 4860.14,4659.77 r180 top
R5 "RMCF0402FT100K" RES-STACK-POLE-0402 4724.62,4645.86 r90 top
R6 "RMCF0402FT10K0" RES-STACK-POLE-0402 4983.42,2631.85 r0 top
R7 "RMCF0603JG10K0" RES-STACK-POLE-0603 5385.63,4384.73 r180 bottom
R8 "RMCF0402FT100K" RES-STACK-POLE-0402 5077.12,4384.63 r180 top
R9 "RMCF0402FT100K" RES-STACK-POLE-0402 5373.11,4115.75 r0 top
R10 "RMCF0603ZT0R00" RES-STACK-POLE-0603 4902.6,3976.18 r90 top
R11 "RMCF0402FT10K0" RES-STACK-POLE-0402 5343.58,4550.6 r0 bottom
R12 "RMCF0402FT93K1" RES-STACK-POLE-0402 5201.65,3692.09 r0 top
R13 "RMCF0402FT220K" RES-STACK-POLE-0402 5111.37,3692.02 r0 top
R15 "RMCF0402FT100K" RES-STACK-POLE-0402 4717.72,3206.69 r180 bottom
R17 "RMCF0603ZT0R00" RES-STACK-POLE-0603 5454.14,4040.33 r180 top
R19 "RMCF0402FT100K" RES-STACK-POLE-0402 4666.34,3131.89 r90 bottom
R20 "RMCF0603JG100K" RES-STACK-POLE-0603 4585.79,3643.59 r180 top
R21 "RMCF0603JG100K" RES-STACK-POLE-0603 4586.28,3573.85 r0 top
R22 "RMCF0402JT220R" RES-STACK-POLE-0402 5359.63,2971.84 r90 top
R24 "RMCF0402FT100K" RES-STACK-POLE-0402 5186.99,3425.78 r90 top
R25 "RMCF0603ZT0R00" RES-STACK-POLE-0603 5455.68,3942.7 r180 top
R28 "ERA-2AEB512X" RES-STACK-POLE-0402 4900,4314 r270 top
R31 "RMCF0402FT4K70" RES-STACK-POLE-0402 4720.59,3622.14 r180 top
R32 "RMCF0402FT4K70" RES-STACK-POLE-0402 4721.81,3565.36 r180 top
R33 "ERA-2AEB512X" RES-STACK-POLE-0402 4900,4083.54 r90 top
R34 "RMCF0603ZT0R00" RES-STACK-POLE-0603 5456.54,3844.76 r180 top
R35 "RMCF0603ZT0R00" RES-STACK-POLE-0603 5351.34,2823.18 r0 top
R36 "RMCF0402FT10R0" RES-STACK-POLE-0402 5641.75,3054.97 r0 top
R37 "RMCF0402FT10R0" RES-STACK-POLE-0402 5641.16,3175.18 r0 top
R38 "RMCF0402ZT0R00" RES-STACK-POLE-0402 5477.51,3021.03 r90 top
R39 "RMCF0603ZT0R00" RES-STACK-POLE-0603 5458.46,3742.78 r180 top
SC1 "S0951-46R" RF-SHIELD+CLIP 4814.44,2934.36 r180 top
SC2 "S0951-46R" RF-SHIELD+CLIP 4923.13,3518.73 r180 top
SW1 "NANOT 240 AS" "TACTILE-SWITCH - TINY" 5154.18,4204.85 r90 top
SW2 "NANOT 240 AS" "TACTILE-SWITCH - TINY" 5173.14,2711.88 r180 top
SYS "TESTPOINT_S" TESTPOINT_S 5175.08,4156.57 r180 top (schematic designator TP5)
TP1 "TESTPOINT_S" TESTPOINT_S 5218.93,3748.57 r180 top
TP2 "TESTPOINT_S" TESTPOINT_S 5567.31,3423.59 r90 bottom
TP3 "TESTPOINT_S" TESTPOINT_S 4944.53,4656.66 r180 top
TP10 "TESTPOINT_S" TESTPOINT_S 5137.97,4342.84 r90 top
TP11 "TESTPOINT_S" TESTPOINT_S 5273.98,3627.63 r90 top
U1 "MAX20345BEWN+T" 21-100260_W563H3+1_ADI 5295.66,4393.51 r270 top
U3 "S25FL512SAGBHEA10" BGA5x5_S25FL512SAGBHEA10_INF 4704.67,2712.26 r270 top
U4 "ADXL367BCCZ-RL7" ADXL367BCCZ-RL7 5526.88,3159.59 r270 top
U5 "ADPD7000BCBZR7" ADPD7001_36-WLCSP 5292.83,3440.15 r90 top
U6 "STM32WB55RGV6" STM32WB55RG 4951.98,3240.65 r0 top
U7 "MLPF-WB55-01E3" Matched-Filter-2.4GHz 5038.78,3003.68 r270 top
U8 "BME280" BME280_FOOTPRINT 5598.42,3381.28 r180 bottom
XO1 "32MHz" HSE-32MHZ 5206.88,3102.38 r270 top
XO2 "ECS-327-9-12R-C-TR" LSE-32K 4709.98,3347.65 r270 top

## Footprints (in the part's own frame and the unit in brackets; to place one, negate y for a bottom-side part, rotate by r counter-clockwise, add the part's x,y. Pads: shape width x height; smd on the part's side, far side on the other; paste and mask are expansions set on the pad)
2-PIN-TH-CONN [mm]
  rect 1.6x1.6 hole 1.1: 1(-1.321,-0.025)
  round 1.6 hole 1.1: 2(1.219,-0.025)
21-100260_W563H3+1_ADI [mm]
  round 0.27 smd paste+0 mask+0.01: A1(-1.4,1.2) A2(-1,1.2) A3(-0.6,1.2) A4(-0.2,1.2) A5(0.2,1.2) A6(0.6,1.2) A7(1,1.2) A8(1.4,1.2) B1(-1.4,0.8) B2(-1,0.8) B3(-0.6,0.8) B4(-0.2,0.8) B5(0.2,0.8) B6(0.6,0.8) B7(1,0.8) B8(1.4,0.8) C1(-1.4,0.4) C2(-1,0.4) C3(-0.6,0.4) C4(-0.2,0.4) C5(0.2,0.4) C6(0.6,0.4) C7(1,0.4) C8(1.4,0.4) D1(-1.4,0) D2(-1,0) D3(-0.6,0) D4(-0.2,0) D5(0.2,0) D6(0.6,0) D7(1,0) D8(1.4,0) E1(-1.4,-0.4) E2(-1,-0.4) E3(-0.6,-0.4) E4(-0.2,-0.4) E5(0.2,-0.4) E6(0.6,-0.4) E7(1,-0.4) E8(1.4,-0.4) F1(-1.4,-0.8) F2(-1,-0.8) F3(-0.6,-0.8) F4(-0.2,-0.8) F5(0.2,-0.8) F6(0.6,-0.8) F7(1,-0.8) F8(1.4,-0.8) G1(-1.4,-1.2) G2(-1,-1.2) G3(-0.6,-1.2) G4(-0.2,-1.2) G5(0.2,-1.2) G6(0.6,-1.2) G7(1,-1.2) G8(1.4,-1.2)
  silkscreen extent -1.83,-1.66 1.83,1.66, body extent -1.7,-1.54 1.7,1.54, height 0.69
2171790001_MOL [mil]
  oval 39x87 hole 71 slot 24 at 0 deg paste-99999 mask-43.5: 13(-170.08,-50.07) 14(170.08,-50.07)
  oval 39x71 hole 55 slot 24 at 0 deg paste-99999 mask-35.5: 15(-170.08,107.41) 16(170.08,107.41)
  rect 24x45 smd paste+0 mask+0: A1/B12(-125.98,130.05) A4/B9(-94.49,130.05) B1/A12(125.98,130.05) B4/A9(94.49,130.05)
  rect 12x45 smd paste+0 mask+0: A5(-49.21,130.05) A6(-9.84,130.05) A7(9.84,130.05) A8(49.21,130.05) B5(68.9,130.05) B6(29.53,130.05) B7(-29.53,130.05) B8(-68.9,130.05)
  silkscreen extent -181,-138 181,61, body extent -176,-133 176,133, height 128
ADPD7001_36-WLCSP [mm]
  round 0.22 smd paste+0 mask+0.025: A1(-1,1) A2(-0.6,1) A3(-0.2,1) A4(0.2,1) A5(0.6,1) A6(1,1) B1(-1,0.6) B2(-0.6,0.6) B3(-0.2,0.6) B4(0.2,0.6) B5(0.6,0.6) B6(1,0.6) C1(-1,0.2) C2(-0.6,0.2) C3(-0.2,0.2) C4(0.2,0.2) C5(0.6,0.2) C6(1,0.2) D1(-1,-0.2) D2(-0.6,-0.2) D3(-0.2,-0.2) D4(0.2,-0.2) D5(0.6,-0.2) D6(1,-0.2) E1(-1,-0.6) E2(-0.6,-0.6) E3(-0.2,-0.6) E4(0.2,-0.6) E5(0.6,-0.6) E6(1,-0.6) F1(-1,-1) F2(-0.6,-1) F3(-0.2,-1) F4(0.2,-1) F5(0.6,-1) F6(1,-1)
  silkscreen extent -1.68,-1.42 1.55,1.68, body extent -1.42,-1.3 1.42,1.3, height 0.59
ADXL367BCCZ-RL7 [mil]
  rect 15x13 smd paste+0 mask+2: 1(-34,29.53) 2(-34,9.84) 3(-34,-9.84) 4(-34,-29.53) 7(34,-29.53) 8(34,-9.84) 9(34,9.84) 10(34,29.53)
  rect 13x15 smd paste+0 mask+2: 5(-9.84,-36) 6(9.84,-36) 11(9.84,36) 12(-9.84,36)
  silkscreen extent -74,-52 51,52, body extent -46,-47 46,47, height 38
ANTENNA [mil]
  rect 14x32 smd paste+0 mask+0: 1(-27.17,0) 2(27.17,0)
  rect 24x10.24 smd paste+0 mask+0: ""(0,9.25) ""(0,-9.25)
  L1_TOP region: -42,20.47 -42,-123.23 -24,-123.23 -24,20.47
  silkscreen extent -36,31 -32,35, body extent -36,-19 36,19, height 16
Battery_connection [mm]
  rect 1.2x1.2 smd paste+0 mask+0.1: 1(-2.5,0) 2(0,0)
BGA5x5_S25FL512SAGBHEA10_INF [mm]
  round 0.4 smd paste+0 mask+0.05: A2(-1,2) A3(0,2) A4(1,2) A5(2,2) B1(-2,1) B2(-1,1) B3(0,1) B4(1,1) B5(2,1) C1(-2,0) C2(-1,0) C3(0,0) C4(1,0) C5(2,0) D1(-2,-1) D2(-1,-1) D3(0,-1) D4(1,-1) D5(2,-1) E1(-2,-2) E2(-1,-2) E3(0,-2) E4(1,-2) E5(2,-2)
  silkscreen extent -3.25,-4.25 3.25,4.25, body extent -3.03,-3.98 2.97,4.02, height 1.2
BME280_FOOTPRINT [mm]
  rect 0.5x0.35 smd mask+0.05: 1(2.05,0) 2(2.05,-0.65) 3(2.05,-1.3) 4(2.05,-1.95) 5(0,-1.95) 6(0,-1.3) 7(0,-0.65) 8(0,0)
  silkscreen extent 1.62,0.1 1.63,0.1, body extent -0.23,-2.22 2.27,0.28, height 1
CAPTDK0402 [mm]
  rect 0.53x0.6 smd: 1(-0.437,0) 2(0.437,0)
  body extent -0.5,-0.25 0.5,0.25, height 0.55
CAPTDK0603 [mm]
  rect 1.01x0.93 smd: 1(-0.709,0) 2(0.709,0)
  silkscreen extent -1.55,-0.79 1.52,0.79, body extent -0.8,-0.4 0.8,0.4, height 0.9
"CT DBLP31.12-6C5D-56-J6Q4_OSR" [mm]
  rrect50% 0.35x0.55 smd paste+0 mask+0.05: 1(-0.75,0.445) 2(-0.75,-0.445)
  rrect50% 1.25x1.45 smd paste+0 mask+0.05: 3(0.3,0)
  silkscreen extent -1.23,-1.03 1.23,1.03, body extent -1.1,-0.9 1.1,0.9, height 0.62
DISPLAY-LED [mm]
  rect 0.8x0.8 smd: 1(-0.75,0) 2(0.75,0)
  body extent -0.8,-0.4 0.8,0.4, height 0.55
electrode [mm]
  rect 1x1 smd paste+0 mask+0.1: 1(0,0)
HSE-32MHZ [mil]
  rect 20x38 smd paste+0 mask+0: 1(-22.5,34.5) 2(-22.5,-34.5) 3(22.5,-34.5) 4(22.5,34.5)
  silkscreen extent -60,33 -56,37, body extent -34,-41 34,41, height 20
IND_DFE2016_MUR-L [mil]
  rect 30x69.03 smd paste+0 mask+0: 1(-30.45,0) 2(30.45,0)
  body extent -39,-24 39,24, height 31
INDMURT0603 [mil]
  rect 38x39 smd paste+0: 1(-30.5,0) 2(30.5,0)
  silkscreen extent -60,-30 60,30, body extent -36,-19 36,19, height 39
INDTDK0201 [mm]
  rect 0.556x0.33 smd paste+0 mask+0.051: 1(-0.393,0) 2(0.393,0)
  body extent -0.32,-0.17 0.32,0.17, height 0.33
"LED_SFH 2703_OSR" [mil]
  rect 33.78x73 smd paste+0: 1(-55.89,0) 2(55.89,0)
  silkscreen extent -111,-44 29,44, body extent -61,-39 61,39, height 24
LSE-32K [mil]
  rect 32x51 smd paste+0: 1(-28,0) 2(28,0)
  body extent -39,-22 40,25, height 25
LXZ1-PR01 [mm] "Molded Diode, 2-Leads, Body 1.30x1.70mm, IPC Medium Density"
  rect 0.8x1.5 smd mask+0.051: 1(-0.525,0) 2(0.525,0)
  silkscreen extent -1.68,0.02 -1.57,0.13, body extent -0.65,-0.85 0.65,0.85, height 0.66
Matched-Filter-2.4GHz [mil]
  rect 8x8 smd paste+0 mask+0.79: 1(-10,23.11) 2(-10,0) 3(-10,-23.11) 4(10,-23.11) 5(10,0) 6(10,23.11)
  silkscreen extent -27,31 -23,35, body extent -20,-32 20,32, height 18
NTC_connection [mm]
  rect 1.2x1.2 smd paste+0 mask+0.1: 1(-2.5,0) 2(0,0)
RED-PD [mm]
  rect 0.91x1.36 smd: 1(-0.75,0) 2(0.75,0)
  silkscreen extent -2.1,-0.03 -2,0.08, body extent -1,-0.63 1,0.63, height 1.1
RES-STACK-POLE-0402 [mm]
  rect 0.59x0.6 smd: 1(-0.42,0) 2(0.42,0)
  body extent -0.55,-0.28 0.55,0.28, height 0.41
RES-STACK-POLE-0603 [mil]
  rect 32x35 smd paste+0: 1(-25.5,0) 2(25.5,0)
  silkscreen extent -52,-28 52,28, body extent -34,-17 34,17, height 24
RF-CONNECTOR [mil]
  rect 39x41 smd paste+0 mask+0: 1(0,60.02)
  rect 41x87 smd: 2(-58.07,-0.02) 3(58.07,-0.02)
  silkscreen extent -93,-71 97,110, body extent -59,-61 59,61, height 50
RF-SHIELD+CLIP [mm]
  rect 0.483x0.508 smd paste+0 mask+0: S1-1(-1.835,0.05) S1-5(1.785,0.05)
  rect 0.711x0.508 smd: S1-2(-1.125,0.05) S1-4(1.075,0.05)
  rect 1.1x1.2 smd: S1-3(-0.025,0.05)
  body extent -1.97,-0.53 1.93,0.57, height 1.29
S15193 [mm] "SMD PIN Diode"
  rect 1.2x1.6 smd: 1(-1.35,0) 2(1.35,0)
  silkscreen extent -2.83,0 -2.72,0.1, body extent -1.65,-1 1.65,1, height 1.2
SAMTEC_FTSH-105-01-F-DV-P-TR [mm]
  rect 0.74x2.79 smd: 01(-2.54,-2.035) 02(-2.54,2.035) 03(-1.27,-2.035) 04(-1.27,2.035) 05(0,-2.035) 06(0,2.035) 07(1.27,-2.035) 08(1.27,2.035) 09(2.54,-2.035) 10(2.54,2.035)
  silkscreen extent -3.94,-2.13 3.26,1.72, body extent -3.18,-2.92 3.18,2.92, height 6.1
"SFH 7015_OSR" [mm]
  rect 0.225x0.5 smd paste+0 mask+0.02: 1(0,0) 2(-0.425,0) 3(0,-1.35) 4(-0.425,-1.35)
  silkscreen extent -0.76,-0.82 0.31,0.3
SOD-523_0P9X1P3_ONS-L [mm]
  rect 0.48x0.4 smd paste+0 mask+0: 1(-0.66,0) 2(0.66,0)
  silkscreen extent -1.07,-0.57 0.77,0.57
SOD-923_514AB_ONS [mm]
  rect 0.36x0.25 smd paste+0 mask+0: 1(-0.42,0) 2(0.42,0)
  silkscreen extent -0.78,-0.46 0.3,0.46
SOT-23 [mm]
  rect 1.1x0.6 smd mask+0.07: 1(-1.3,0.95) 2(-1.3,0) 3(-1.3,-0.95) 4(1.3,-0.95) 5(1.3,0) 6(1.3,0.95)
  body extent -1.5,-1.55 1.5,1.5, height 1.45
STM32WB55RG [mm] "Ultra-low-power dual core Arm Cortex-M4 MCU 64 MHz, Cortex-M0+ 32 MHz with 1 Mbyte of Flash memory, Bluetooth LE 5.4, 802.15.4, Zigbee, Thread, Matter, USB, LCD, AES-256"
  rect 0.91x0.204 smd paste+0 mask+0.02: 1(-3.922,3.2) 2(-3.922,2.8) 3(-3.922,2.4) 4(-3.922,2) 5(-3.922,1.6) 6(-3.922,1.2) 7(-3.922,0.8) 8(-3.922,0.4) 9(-3.922,0) 10(-3.922,-0.4) 11(-3.922,-0.8) 12(-3.922,-1.2) 13(-3.922,-1.6) 14(-3.922,-2) 15(-3.922,-2.4) 16(-3.922,-2.8) 17(-3.922,-3.2) 35(3.922,-3.2) 36(3.922,-2.8) 37(3.922,-2.4) 38(3.922,-2) 39(3.922,-1.6) 40(3.922,-1.2) 41(3.922,-0.8) 42(3.922,-0.4) 43(3.922,0) 44(3.922,0.4) 45(3.922,0.8) 46(3.922,1.2) 47(3.922,1.6) 48(3.922,2) 49(3.922,2.4) 50(3.922,2.8) 51(3.922,3.2)
  rect 0.204x0.91 smd paste+0 mask+0.02: 18(-3.2,-3.922) 19(-2.8,-3.922) 20(-2.4,-3.922) 21(-2,-3.922) 22(-1.6,-3.922) 23(-1.2,-3.922) 24(-0.8,-3.922) 25(-0.4,-3.922) 26(0,-3.922) 27(0.4,-3.922) 28(0.8,-3.922) 29(1.2,-3.922) 30(1.6,-3.922) 31(2,-3.922) 32(2.4,-3.922) 33(2.8,-3.922) 34(3.2,-3.922) 52(3.2,3.922) 53(2.8,3.922) 54(2.4,3.922) 55(2,3.922) 56(1.6,3.922) 57(1.2,3.922) 58(0.8,3.922) 59(0.4,3.922) 60(0,3.922) 61(-0.4,3.922) 62(-0.8,3.922) 63(-1.2,3.922) 64(-1.6,3.922) 65(-2,3.922) 66(-2.4,3.922) 67(-2.8,3.922) 68(-3.2,3.922)
  rect 6.502x6.502 smd paste-3.251 mask+0.02: 69(0,0)
  silkscreen extent -4.2,-4.2 4.2,4.2, body extent -4.08,-4.08 4.08,4.08, height 0.99
"TACTILE-SWITCH - TINY" [mm] "NANOT 240 AS SWITCH TACTILE SPST-NO 0.02A 15V"
  rect 0.5x1.65 smd paste+0: 1(0,0) 2(2.3,0)
TESTPOINT_S [mm]
  round 1 smd: 1(0,0)
TVSDIODE-0402 [mm] "DFN, 2-Leads, Body 0.61x1.01mm, Pitch 0.65mm, IPC Medium Density"
  rect 0.6x0.6 smd: 1(-0.45,0) 2(0.45,0)
  silkscreen extent -1.2,-0.05 -1.1,0.05, body extent -0.54,-0.34 0.54,0.34, height 0.53

## Part data
1 1V8D 2 3V3D 3V3L GND GND GND GND ISET L3 SYS TP1 TP2 TP3 TP10 TP11: "Testpoint Surface Pad"
AE1: "TDK - ANT016008LCS2442MA2 - Chip Antenna, ISM, 2.442 GHz, 50 Ohm, 1.6mm x 0.8mm x 0.4mm", Case/Package=0603, Manufacturer=TDK, Max Frequency=27MHz, Supplier Part Number 1=445-172405CT-ND, Category="RF Antennas", ComponentLink1Description=http://www.farnell.com/datasheets/2294435.pdf?src-supplier=Farnell, ComponentLink1URL=http://www.farnell.com/datasheets/2294435.pdf?src-supplier=Farnell, ComponentLink2Description=https://product.tdk.com/info/en/documents/data_sheet/rf_ant_ant016008lcs2442ma2_summary_en.pdf?src-supplier=Digi-Key, ComponentLink2URL=https://product.tdk.com/info/en/documents/data_sheet/rf_ant_ant016008lcs2442ma2_summary_en.pdf?src-supplier=Digi-Key, ComponentLink3Description=https://product.tdk.com/info/en/documents/data_sheet/rf_ant_ant016008lcs2442ma2_en.pdf?src-supplier=Avnet, ComponentLink3URL=https://product.tdk.com/info/en/documents/data_sheet/rf_ant_ant016008lcs2442ma2_en.pdf?src-supplier=Avnet, ComponentLink4Description=http://www.farnell.com/datasheets/1932405.pdf?src-supplier=Element14, ComponentLink4URL=http://www.farnell.com/datasheets/1932405.pdf?src-supplier=Element14, Height=0.016inch, Manufacturer Part Number=ANT016008LCS2442MA2, Mount="Surface Mount", Number of Bands=1, Number of Pins=6, Packaging="Cut Tape", Pricing 1="1=0.72000, 10=0.63500, 25=0.59680, 100=0.48700, 250=0.45236, 500=0.38500, 1000=0.30800 (USD)", REACH SVHC="No SVHC", RoHS=Yes, RoHS Compliant=Yes, Stock 1=16359, Supplier 1=Digi-Key, Termination=Solder
C1 C8 C16 C18 C23 C24 C50: "CAP CER 1UF 35V X5R 0402", Supplier Part Number 1=445-9073-1-ND, Supplier 1=Digi-Key
C2 C38: "CAP CER 4.7UF 10V X5R 0402", Supplier Part Number 1=445-13820-1-ND, Supplier 1=Digi-Key
C3 C4 C5 C9 C10 C13 C14: "CAP CER 22UF 10V X5R 0603", Supplier 1=Avnet, Supplier Part Number 1=GRM188R61A226ME15D
C6 C11 C12 C15 C64: "CAP CER 2.2UF 16V X5R 0402", Supplier 1=Avnet, Supplier Part Number 1=CL05A225KO5NQNC
C7 C17 C26 C29 C30 C31 C33 C35 C36 C37 C40 C41 C42 C48 C51 C52 C53 C55 C57 C58 C60 C61: "CAP CER 0.1UF 50V X7R 0402", Supplier Part Number 1=445-5932-1-ND, Supplier 1=Digi-Key
C19 C20 C45 C46: "CAP CER 12PF 50V C0G 0402", Supplier Part Number 1=445-5585-1-ND, Supplier 1=Digi-Key
C21 C22 C25 C27: "CAP CER 0.47UF 6.3V X5R 0402", Supplier 1=Avnet, Supplier Part Number 1=GRM155R60J474KE19D
C28 C32 C54 C56: "CAP SMD,0402,X5R,10UF,20%,6.3V"
C34 C47 C49: "CAP CER 10UF 10V X5R 0402", Supplier Part Number 1=490-GRM155R61A106ME11DCT-ND, Supplier 1=Digi-Key
C43: library part CGA2B2C0G1H101J050BA_1, "CAP CER 100PF 50V C0G 0402", Supplier Part Number 1=445-5596-1-ND, Supplier 1=Digi-Key
C62: "CAP CER 100PF 50V C0G 0402", Supplier Part Number 1=445-5596-1-ND, Supplier 1=Digi-Key
CR1: "ESD Protection for USB 2.0 High Speed", Manufacturer_Name=STMicroelectronics, Copyright="Copyright (C) 2025 Ultra Librarian. All rights reserved.", Manufacturer_Part_Number=USBLC6-2SC6, RefDes=RefDes, Supplier 1=Avnet, Supplier Part Number 1=USBLC6-2SC6, Type=Type
CR3: "TVS DIODE 5VWM 12.3VC SOD923", Manufacturer_Name=onsemi, Copyright="Copyright (C) 2026 Ultra Librarian. All rights reserved.", Manufacturer_Part_Number=ESD9X5.0ST5G, Supplier 1=Avnet, Supplier Part Number 1=ESD9X5.0ST5G
D1: "TVS DIODE 3.3V 7V DFN1006-2", Breakdown Voltage=6.5V, Clamping Voltage=7V, Manufacturer=Diodes, Max Operating Temperature=150°C, Max Power Dissipation=35W, Max Reverse Leakage Current=100nA, Min Breakdown Voltage=3.8V, Min Operating Temperature=-65°C, Package Quantity=10000, Peak Pulse Current=5A, Power Line Protection=No, Resistor Type=Zener, Reverse Standoff Voltage=3.3V, Supplier Part Number 1=DESD3V3S1BL-7BDICT-ND, Category="TVS Diodes", ComponentLink1Description=Datasheet, ComponentLink1URL=https://www.diodes.com/assets/Datasheets/DESD3V3S1BL.pdf, ComponentLink2Description="New link", Direction=Bidirectional, Element Configuration=Single, Manufacturer Part Number=DESD3V3S1BL-7B, Mount="Surface Mount", Number of Bidirectional Channels=1, Number of Pins=2, Packaging="Tape and Reel", Peak Pulse Power=35W, Polarity=Bidirectional, Pricing 1="1=0.32000, 10=0.26000, 100=0.13790, 500=0.09076, 1000=0.06171, 2000=0.05566, 5000=0.04840 (USD)", Radiation Hardening=No, RoHS=Yes, RoHS Compliant=Yes, Stock 1=514017, Supplier 1=Digi-Key, Termination=SMD/SMT, Working Voltage=3.3V
D3 D10 D11: "SENSOR PHOTODIODE 940NM 2SMD", Manufacturer_Name="ams OSRAM", Supplier Part Number 1=Q65112A8147, Copyright="Copyright (C) 2025 Ultra Librarian. All rights reserved.", Manufacturer_Part_Number="SFH 2703", Supplier 1=Avnet
D4 D5: "LED LUXEON Z RYL BLUE 450NM 2SMD", Case/Package=SMD/SMT, Color=Blue, Forward Current=500mA, Forward Voltage=2.9V, Manufacturer="Philips Lumileds", Max Operating Temperature=135°C, Min Operating Temperature=-40°C, Package Quantity=2000, Supplier Part Number 1=1416-1058-1-ND, Category=LEDs, ComponentLink1Description=https://datasheet.ciiva.com/25632/0900766b81251f28-25632625.pdf?src-supplier=RSComponents, ComponentLink1URL=https://datasheet.ciiva.com/25632/0900766b81251f28-25632625.pdf?src-supplier=RSComponents, ComponentLink2Description=https://datasheet.ciiva.com/16345/ds105-16345515.pdf?src-supplier=Future+Electronics, ComponentLink2URL=https://datasheet.ciiva.com/16345/ds105-16345515.pdf?src-supplier=Future+Electronics, Dominant Wavelength=447.5nm, Height=0.66mm, Illumination Color=Blue, Lead Free="Lead Free", Length=1.7mm, Lens Color=Blue, Lens Style=Rectangular,Round, Manufacturer Part Number=LXZ1-PR01, Mount="Surface Mount", Number of LEDs=1, Number of Pins=2, Packaging="Tape and Reel", Pricing 1="1=2.57000, 10=1.71400, 100=1.31940, 500=1.19264, 1000=1.16469 (USD)", RoHS=Yes, Stock 1=4609, Supplier 1=Digi-Key, Test Current=500mA, Viewing Angle=125°, Wavelength=447.5nm, Width=1.3mm
D6: "PHOTODIODE RED MICRO SMT", Supplier Part Number 1=209-019-141-411-RCT-ND, Supplier 1=Digi-Key
D7: "PHOTODIODE PIN 380 NM-1000 NM 20V 0.64 A/W SMD", Manufacturer=Hamamatsu, ComponentLink1Description=Datasheet, ComponentLink1URL=https://www.hamamatsu.com/resources/pdf/ssd/s13773_kpin1088e.pdf, Manufacturer Part Number=S15193, Supplier 1=Hamamatsu, Supplier 1 Part Number=S15193
D8: "LED GREEN CLEAR SMD Green 536nm LED Indication - Discrete 2.3V 3-SMD, No Lead", Manufacturer_Name="ams OSRAM", Supplier Part Number 1=Q65112A4607, Copyright="Copyright (C) 2025 Ultra Librarian. All rights reserved.", Manufacturer_Part_Number="CT DBLP31.12-6C5D-56-J6Q4", Supplier 1=Avnet
D9: "Multi-Color LEDs Red / IR LED 655nm / 940nm", Manufacturer_Name="ams OSRAM", Supplier Part Number 1=Q65113A4161, Copyright="Copyright (C) 2026 Ultra Librarian. All rights reserved.", Manufacturer_Part_Number="SFH 7015", RefDes=RefDes, Supplier 1=Avnet, Type=Type
D12: "DIODE SCHOTTKY 30V 200MA SOD523", Manufacturer=Hamamatsu, Manufacturer Part Number=S15193, ComponentLink1Description=Datasheet, ComponentLink1URL=https://www.hamamatsu.com/resources/pdf/ssd/s13773_kpin1088e.pdf, Supplier 1=Hamamatsu, Supplier 1 Part Number=S15193
D13: library part LTST-C191KFKT, "LED ORANGE CLEAR 0603 SMD", Supplier Part Number 1=160-1445-1-ND, Supplier 1=Digi-Key
FB1 FB2 FB3 FB4: "FERRITE BEAD 120 OHM 0603 1LN", Supplier 1=Newark, Supplier Part Number 1=MAF1608GAD601CT000
FB5: "FERRITE BEAD 600 OHM 0603 1LN", Supplier Part Number 1=283-MFBA3V1608K-601-RCT-ND, Supplier 1=DigiKey
J1: "Connector Header Surface Mount 10 position 0.050\" (1.27mm)", Package=None, Check_prices=https://www.snapeda.com/parts/FTSH-105-01-F-DV-K-TR/Samtec/view-part/?ref=eda, MF="Samtec Inc.", MP=FTSH-105-01-F-DV-K-TR, SnapEDA_Link=https://www.snapeda.com/parts/FTSH-105-01-F-DV-K-TR/Samtec/view-part/?ref=snap
J2: "Power Connector"
J3: "Universal Serial Bus (USB) Shielded I/O Receptacle, Type C, Right-Angle, Top Mount, Surface Mount, Single Row, 16 Circuits, Gold (Au) Plating", Manufacturer_Name="Molex Connector Corporation", Copyright="Copyright (C) 2025 Ultra Librarian. All rights reserved.", Manufacturer_Part_Number=2171790001, RefDes=RefDes, Type=Type
J5: "CONN U.FL RCPT STR 50 OHM SMD", Manufacturer=Hirose, Supplier Part Number 1=H9161CT-ND, Copyright="Copyright (C) 2021 Ultra Librarian. All rights reserved.", Digi-Key_Part_Number_1=H9161TR-ND, Digi-Key_Part_Number_2=H9161CT-ND, Digi-Key_Part_Number_3=H9161DKR-ND, Digi-Key_Part_Number_4=H9161TR-NDL, Manufacturer Part Number=U.FL-R-SMT(10), RefDes=RefDes, Supplier 1=Digi-Key, Type=DEV
J6 J7 J8 J9: "one pad opening"
J11: "NTC THERMISTOR 10KOHM 1%"
L5: "FIXED IND 1.8NH 700MA 100MOHM SM", Supplier Part Number 1=445-172430-1-ND, Supplier 1=Digi-Key
L6: "FIXED IND 2.9NH 450MA 300MOHM SM", Supplier Part Number 1=445-16842-6-ND, Supplier 1=Digi-Key
L7 L9 L10: "2.2 µH Shielded Drum Core, Wirewound Inductor 1.8 A 116mOhm Max 0806 (2016 Metric)", Manufacturer_Name=Murata, Manufacturer_Part_Number=DFE201612E-2R2M=P2, Copyright="Copyright (C) 2025 Ultra Librarian. All rights reserved.", Type="Fixed Inductors"
R1 R12: "RES 93.1K OHM 1% 1/16W 0402", Manufacturer_Part_Number=RMCF0603FT80K6, Mfr_Name="Stackpole International", Supplier Part Number 1=RMCF0402FT93K1CT-ND, Copyright="Copyright (C) 2022 Ultra Librarian. All rights reserved.", Digi-Key_Part_Number_1=RMCF0603FT80K6CT-ND, Digi-Key_Part_Number_2=RMCF0603FT80K6DKR-ND, Digi-Key_Part_Number_3=RMCF0603FT80K6TR-ND, RefDes=RefDes, Supplier 1=Digi-Key, Type=DEV
R2 R13: "RES 220K OHM 1% 1/16W 0402", Supplier Part Number 1=RMCF0402FT220KCT-ND, Supplier 1=Digi-Key
R3 R4 R10 R17 R25 R34 R35 R39: "RES 0 OHM JUMPER 1/10W 0603", Supplier Part Number 1=RMCF0603ZT0R00CT-ND, Supplier 1=Digi-Key
R5 R8 R9 R15 R19 R24: "RES 100K OHM 1% 1/16W 0402", Supplier Part Number 1=RMCF0402FT100KCT-ND, Supplier 1=Digi-Key
R6 R11: "RES 10K OHM 1% 1/16W 0402", Supplier Part Number 1=RMCF0402FT10K0CT-ND, Supplier 1=Digi-Key
R7: "RES 10K OHM 5% 1/10W 0603", Supplier Part Number 1=738-RMCF0603JG10K0CT-ND, Supplier 1=Digi-Key
R20 R21: "RES 100K OHM 5% 1/10W 0603", Supplier Part Number 1=RMCF0603JG100KCT-ND, Supplier 1=DigiKey
R22: "RES 220 OHM 5% 1/16W 0402", Supplier Part Number 1=RMCF0402JT220RCT-ND, Supplier 1=Digi-Key
R28 R33: "RES SMD 5.1K OHM 0.1% 1/16W 0402", Supplier 1="Arrow Electronics", Supplier Part Number 1=ERA-2AEB512X
R31 R32: "RES 4.7K OHM 1% 1/16W 0402", Supplier Part Number 1=RMCF0402FT4K70CT-ND, Supplier 1=Digi-Key
R36 R37: "RES 10 OHM 1% 1/16W 0402", Supplier Part Number 1=RMCF0402FT10R0CT-ND, Supplier 1=Digi-Key
R38: "RES 0 OHM JUMPER 1/16W 0402", Supplier Part Number 1=RMCF0402ZT0R00CT-ND, Supplier 1=Digi-Key
SC1 SC2: "RFI SHIELD CLIP MINI TIN SMD", Supplier Part Number 1=952-2669-1-ND, Supplier 1=Digi-Key
SW1 SW2: "SWITCH TACTILE SPST-NO 0.02A 15V", Supplier Part Number 1=2189518, Supplier 1="Future Electronics"
U1: "PMIC with Ultra-Low IQ Voltage Regulators, Buck-Boost for Optical Sensing and Charger for Small Lithium Ion Systems", Manufacturer_Name="Analog Devices Inc", Manufacturer_Part_Number=MAX20345KEWN+T, Supplier Part Number 1=505-MAX20345BEWN+TTR-ND, Copyright="Copyright (C) 2026 Ultra Librarian. All rights reserved.", RefDes=RefDes, Supplier 1=DigiKey, Type=Type
U3: "FLASH - NOR Memory IC 512Mbit SPI - Quad I/O 133 MHz 24-BGA (6x8)", Manufacturer_Name=Infineon, Copyright="Copyright (C) 2025 Ultra Librarian. All rights reserved.", Manufacturer_Part_Number=S25FL512SAGBHEA10, RefDes=RefDes, Type=Memory
U4: "Accelerometer X, Y, Z Axis ±2g, 4g, 8g 6.25Hz ~ 200Hz 12-LGA (2.2x2.3)", Manufacturer_Name="Analog Devices Inc", Supplier Part Number 1=505-ADXL367BCCZ-RL7CT-ND, Copyright="Copyright (C) 2025 Ultra Librarian. All rights reserved.", Manufacturer_Part_Number=ADXL367BCCZ-RL7, RefDes=RefDes, Supplier 1=DigiKey, Type="Motion Sensors"
U5: "Multimodal Sensor Front End", Manufacturer_Name="Analog Devices Inc", Copyright="Copyright (C) 2026 Ultra Librarian. All rights reserved.", Manufacturer_Part_Number=ADPD7000BCBZR7, RefDes=RefDes, Type=Interface
U6: "Ultra-low-power dual core Arm Cortex-M4 MCU 64 MHz, Cortex-M0+ 32 MHz with 1 Mbyte of Flash memory, Bluetooth LE 5.4, 802.15.4, Zigbee, Thread, Matter, USB, LCD, AES-256", Manufacturer_Name=STMicroelectronics, Copyright="Copyright (C) 2025 Ultra Librarian. All rights reserved.", Manufacturer_Part_Number=STM32WB55RGV6, RefDes=RefDes, Type=Type
U7: "2.4 GHz Matched filter companion chip for STM32WB55Cx and STM32WB55Rx", Manufacturer=STMicroelectronics, Supplier Part Number 1=497-19088-1-ND, ComponentLink1Description=http://www.farnell.com/datasheets/2802556.pdf?src-supplier=Farnell, ComponentLink1URL=http://www.farnell.com/datasheets/2802556.pdf?src-supplier=Farnell, ComponentLink2Description=http://www.farnell.com/datasheets/2802556.pdf?src-supplier=Newark, ComponentLink2URL=http://www.farnell.com/datasheets/2802556.pdf?src-supplier=Newark, Manufacturer Part Number=MLPF-WB55-01E3, Pricing 1="1=0.30000, 10=0.28300, 25=0.26960, 50=0.26100, 100=0.25230, 250=0.23924, 500=0.20010, 1000=0.15530 (USD)", RoHS=Yes, Stock 1=16369, Supplier 1=Digi-Key
U8: "SENSOR PRESSURE HUMIDITY TEMP Humidity, Pressure, Temperature 0 ~ 100% RH I2C, SPI ±3% 1 s Surface Mount"
XO1: library part NX2016SA-32MHZ-EXS00A-CS06654, "CRYSTAL 32MHZ 8PF 60R SMD", Case/Package=SMD/SMT, ESR (Equivalent Series Resistance)=60R, Load Capacitance=8pF, Manufacturer=NDK, Max Operating Temperature=125°C, Min Operating Temperature=-40°C, Ratings=AEC-Q200, Supplier Part Number 1=644-1373-1-ND, Frequency=32MHz, Manufacturer Part Number=NX2016SA-32MHZ-EXS00A-CS06654, Mount="Surface Mount", Packaging="Tape and Reel", Pricing 1="1=0.58000, 10=0.48200, 50=0.43420, 100=0.38600, 500=0.36670, 1000=0.30880 (USD)", RoHS=No, Supplier 1=Digi-Key
XO2: "Crystal 0.032768MHz ±10ppm (Tol) 9pF Flexural 70000Ohm Automotive 2-Pin Ultra Mini-CSMD T/R", Case/Package=SMD/SMT, ESR (Equivalent Series Resistance)=70kR, Frequency=32.768kHz, Frequency Tolerance=10ppm, Load Capacitance=9pF, Manufacturer="ECS International", Manufacturer Part Number=ECS-.327-9-12R-C-TR, Max Operating Temperature=85°C, Min Operating Temperature=-40°C, Supplier Part Number 1=XC2744CT-ND, ComponentLink1Description=https://www.ecsxtal.com/store/pdf/ECX-12R.pdf?src-supplier=Digi-Key, ComponentLink1URL=https://www.ecsxtal.com/store/pdf/ECX-12R.pdf?src-supplier=Digi-Key, Mount="Surface Mount", Packaging="Tape and Reel", Pricing 1="1=0.79000, 10=0.65700, 50=0.59160, 100=0.52580, 500=0.49952, 1000=0.42064 (USD)", RoHS=Yes, Stock 1=152, Supplier 1=Digi-Key

## Via types
v1: diameter 17.72, hole 7.87, L1_TOP to L6_BOTTOM, tented both sides, 216 vias
v2: diameter 13.78, hole 5.91, L1_TOP to L6_BOTTOM, tented both sides, 93 vias
v3: diameter 17.72, hole 9.84, L1_TOP to L6_BOTTOM, 66 vias
v4: diameter 9.84, hole 3.94, L1_TOP to L2_GND, tented top, 49 vias
v5: diameter 20, hole 10, L1_TOP to L6_BOTTOM, tented both sides, 48 vias
v6: diameter 17.72, hole 7.87, L1_TOP to L6_BOTTOM, 46 vias
v7: diameter 9.84, hole 3.94, L2_GND to L3_Signal, tented top, 40 vias
v8: diameter 20, hole 12, L1_TOP to L6_BOTTOM, tented both sides, 30 vias
v9: diameter 11.81, hole 5.91, L3_Signal to L4_PWR, 20 vias
v10: diameter 11.81, hole 5.91, L1_TOP to L6_BOTTOM, tented both sides, 5 vias
v11: diameter 9.84, hole 3.94, L1_TOP to L2_GND, tented both sides, 3 vias
v12: diameter 17.72, hole 9.84, L1_TOP to L6_BOTTOM, tented both sides, 3 vias

## Nets (pads, with @x,y where several pads share a name; then routed paths per layer and width w, separated by ;. In a path a pad name is that pad's centre, name@x,y a point inside that pad or via, vN(x,y) a via of type N, cw(c..) or ccw(c..) an arc to the next point about the centre after c; other vN are vias at no path point)
1V8A: C11.1 C29.1 C34.1 R1.2 R12.2 TP11.1 U1.G3 U5.D3 | length 2132.7
  L1_TOP w7: v2(5269.72,3520.24) C29.1@5269.72,3540.24
  L1_TOP w8: 5217.49,4417.13 U1.G3@5248.41,4417.13
  L1_TOP w10: C11.1@5189.74,4390.76 5191.12,4390.76 5217.49,4417.13
  L1_TOP w15: v1(5165.3,4391.48) 5165.66,4391.12 5189.38,4391.12 C11.1@5189.74,4390.76 ; R12.2@5218.18,3692.09 5222.3,3687.98 5222.3,3676.79 5273.98,3625.1 5271.45,3625.1 5225.04,3578.69 ; v1(5249.39,3541.45) v1@5249.91,3540.93 ; C29.1@5272.34,3540.93 5274.62,3538.65 5275.83,3538.65 5278.08,3540.9 5325.22,3540.9 C34.1@5327.47,3538.65 ; v1(5326.56,3350.26) 5326.56,3349.52 5328.99,3347.09 5328.99,3320.01 5329.42,3319.58 R1.2@5329.42,3315.7
  L1_TOP w20: 5225.04,3578.69 v1(5225.04,3534.28) 5242.21,3534.28 v1(5249.39,3541.45) ; v1@5249.91,3540.93 C29.1@5272.34,3540.93
  L1_TOP w30: TP11.1@5273.98,3625.1 TP11.1@5273.98,3627.63
  L3_Signal w4: 5269.2,3463.78 5286.62,3446.37 5287.75,3446.37 5300.7,3433.41 v7@5300.7,3432.28
  L3_Signal w7: 5269.2,3463.78 5269.2,3519.72 v2(5269.72,3520.24)
  L4_PWR w30: v1(5165.3,4391.48) 5162.28,4394.5 v1(5139.71,4394.5) 5097.1,4351.9 5097.1,4154.85 4865.33,3923.08 4865.33,3914.23 4860.54,3909.44 4860.54,3659.42 4975.15,3544.8 5006.47,3544.8 5011.49,3539.79 5193.64,3539.79 ; v1@5224.98,3534.54 5242.48,3534.54 v1(5249.39,3541.45) ; v1(5225.04,3534.28) 5199.14,3534.28 5193.64,3539.79 ; v1(5326.56,3350.26) 5324.28,3350.26 5193.64,3480.9 5193.64,3539.79
  other v4: 5300.69,3432.2
  other v7: 5300.69,3432.2
1V8D: 1V8D.1 C13.1 C31.1 C47.1 L10.1 U1.F2 U5.D2 | length 2167.1
  L1_TOP w7.87: L10.1@5171.86,4447.36 L10.1@5174.63,4444.59
  L1_TOP w10: C31.1@5271.46,3341.12 5272.84,3341.12 5273.72,3341.99 5289.53,3341.99 v2(5290.26,3342.71)
  L1_TOP w15: 1V8D.1@5020.35,4530.62 5020.35,4468.96 5030.49,4458.82 v1(5030.49,4458.09) v1@5054.26,4458.09 ; v1(5054.15,4457.98) v1@5054.26,4458.09 ; v1@5056.1,4457.51 5055.52,4458.09 v1@5054.26,4458.09 ; C13.1@5082.1,4458.51 5081.84,4458.24 5054.41,4458.24 v1@5054.26,4458.09 ; C13.1@5089.08,4458.76 5129.65,4458.76 5131.6,4456.82 5136.06,4456.82 5138.01,4454.86 5164.36,4454.86 L10.1@5171.86,4447.36 ; L10.1@5174.63,4444.59 5176.41,4442.81 v2(5217.4,4442.81) ; v1(5195.74,3338.59) 5196.26,3339.11 5217.58,3339.11 C47.1@5219.62,3341.14 ; C47.1@5219.62,3341.14 C31.1@5271.46,3341.12
  L3_Signal w7: 5245.11,4432.88 v4(5264.21,4432.91) ; v2(5290.26,3342.71) 5290.26,3362.11 5291.75,3363.6 5291.75,3372.49 5300.7,3381.45 v7@5300.7,3416.53
  L3_Signal w8: v2(5217.4,4442.81) 5235.19,4442.81 5245.11,4432.88
  L4_PWR w30: v1(5054.15,4457.98) 5054.03,4458.09 v1(5030.49,4458.09) 5002.72,4458.09 4996.04,4464.77 4962.9,4464.77 4718.35,4220.21 4718.35,3548.12 4907.23,3359.24 5175.08,3359.24 v1(5195.74,3338.59)
  other v4: 5300.62,3416.61
  other v7: 5300.62,3416.61 5264.21,4432.91
3V3_LED: 3V3L.1 C12.1 FB4.2 U1.A5 | length 1146.1
  L1_TOP w7: U1.A5@5342.9,4385.64 5343.6,4386.33 5349.65,4386.33 5374.96,4411.65
  L1_TOP w15: 5374.96,4411.65 5445.84,4411.65 5451.41,4406.08 5515.62,4406.08 v1(5516.14,4406.6) ; C12.1@5515.21,4430.8 5516.14,4429.87 v1(5516.14,4406.6) ; 3V3L.1@5549.93,4382.8 5545.91,4386.82 5524.55,4386.82 5523.65,4387.71 5523.65,4388.45 5516.66,4395.44 5516.66,4406.08 v1(5516.14,4406.6)
  L4_PWR w40: 5092.02,3968.84 5114.38,3968.84 5136.23,3968.84 v5(5136.48,3968.58) 5211.14,4043.24 5472.61,4043.24 5554.47,4125.1 5554.47,4368.27 v1(5516.14,4406.6)
  L6_BOTTOM w40: FB4.2@5076.91,3969.32 5114.38,3969.32 5135.75,3969.32 v5(5136.48,3968.58)
  other v1: 5524.03,4387.34
  other v5: 5114.38,3968.58